# EAGLE board SparkFun RTK Express Plus-Panel (EAGLE 9.6.2), part 1 of 3
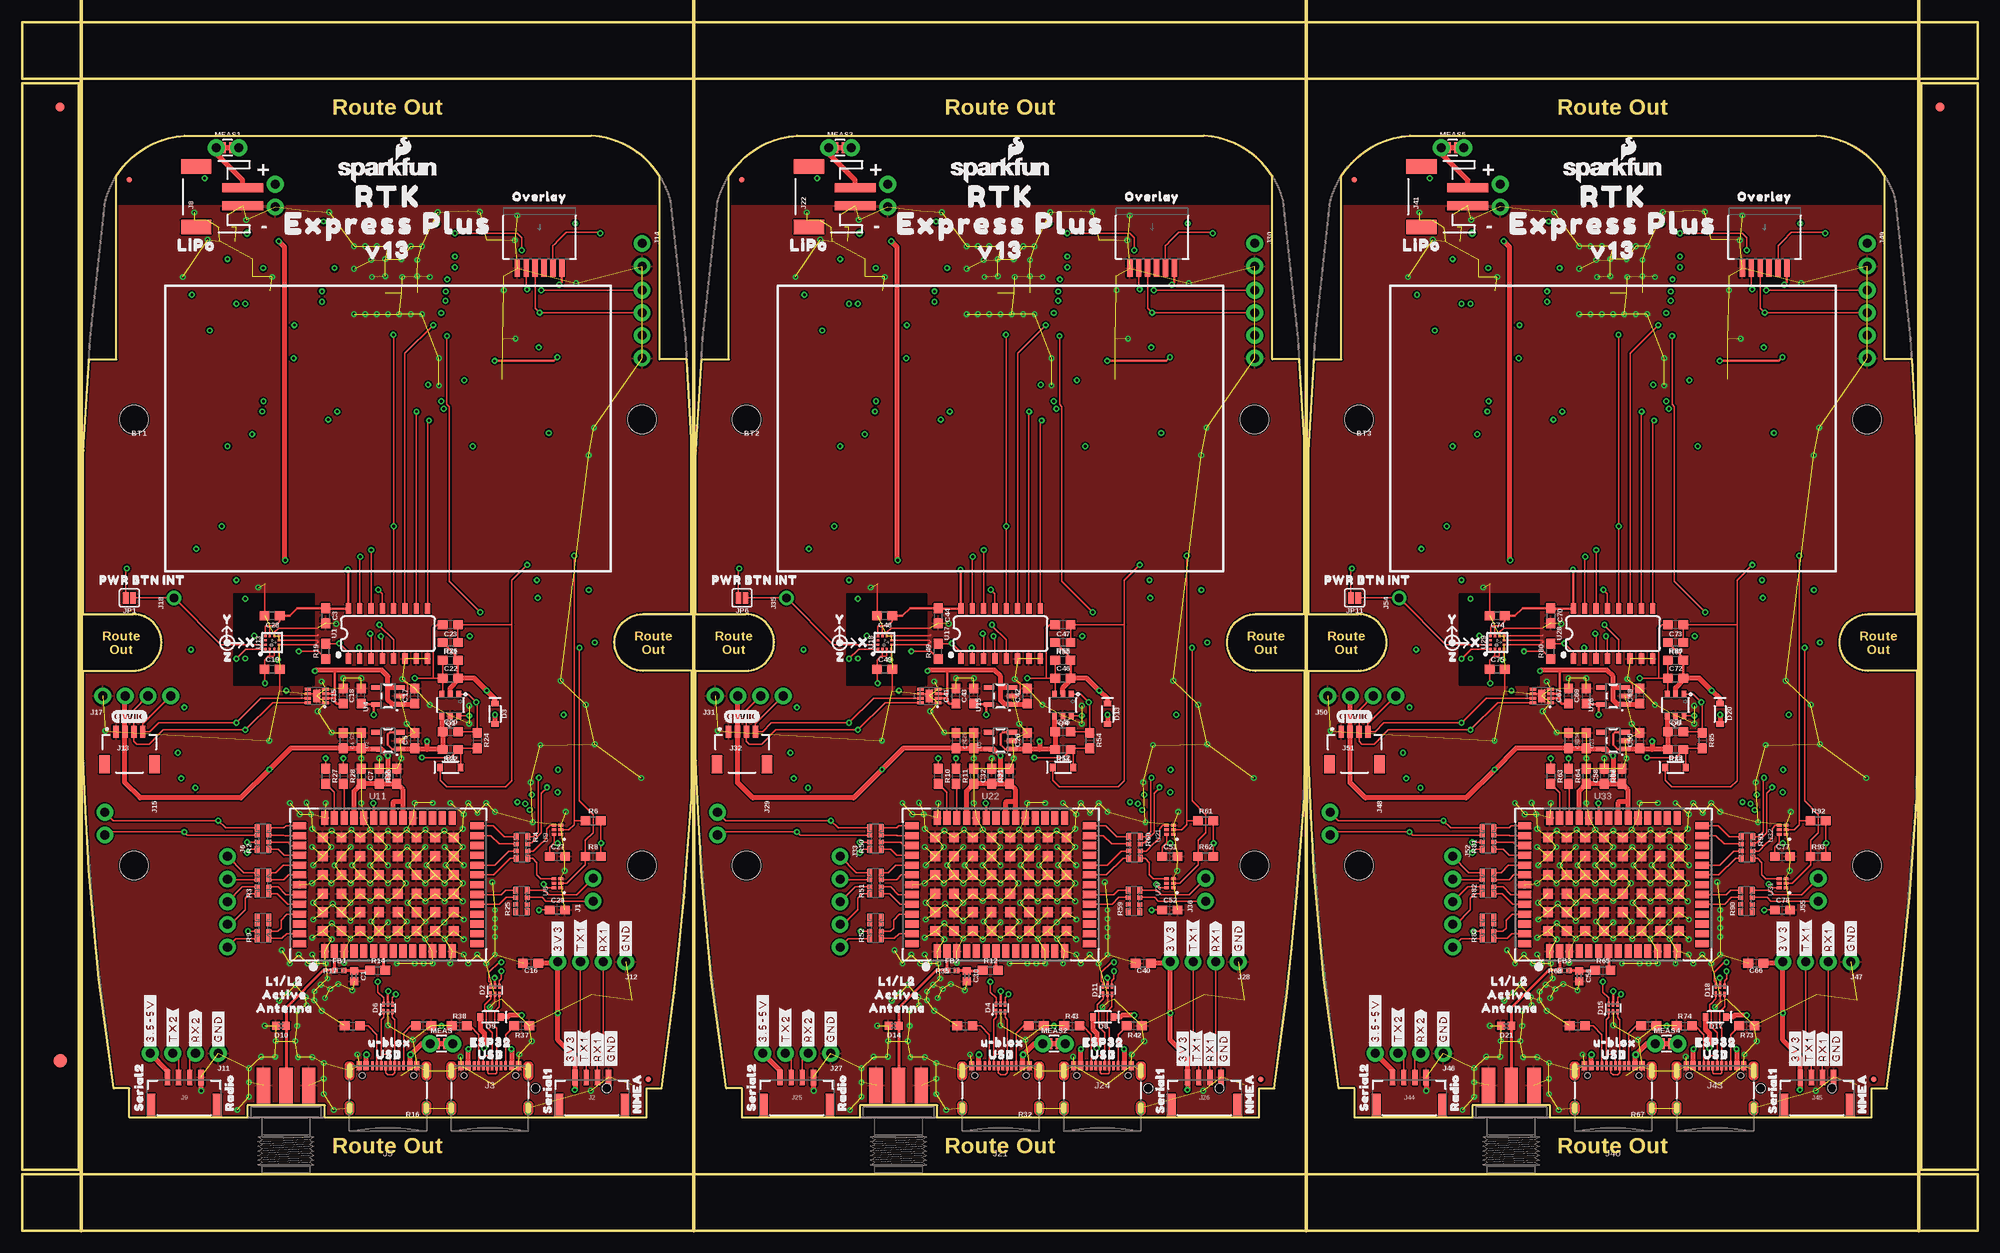
[diagram p0: board, top side]
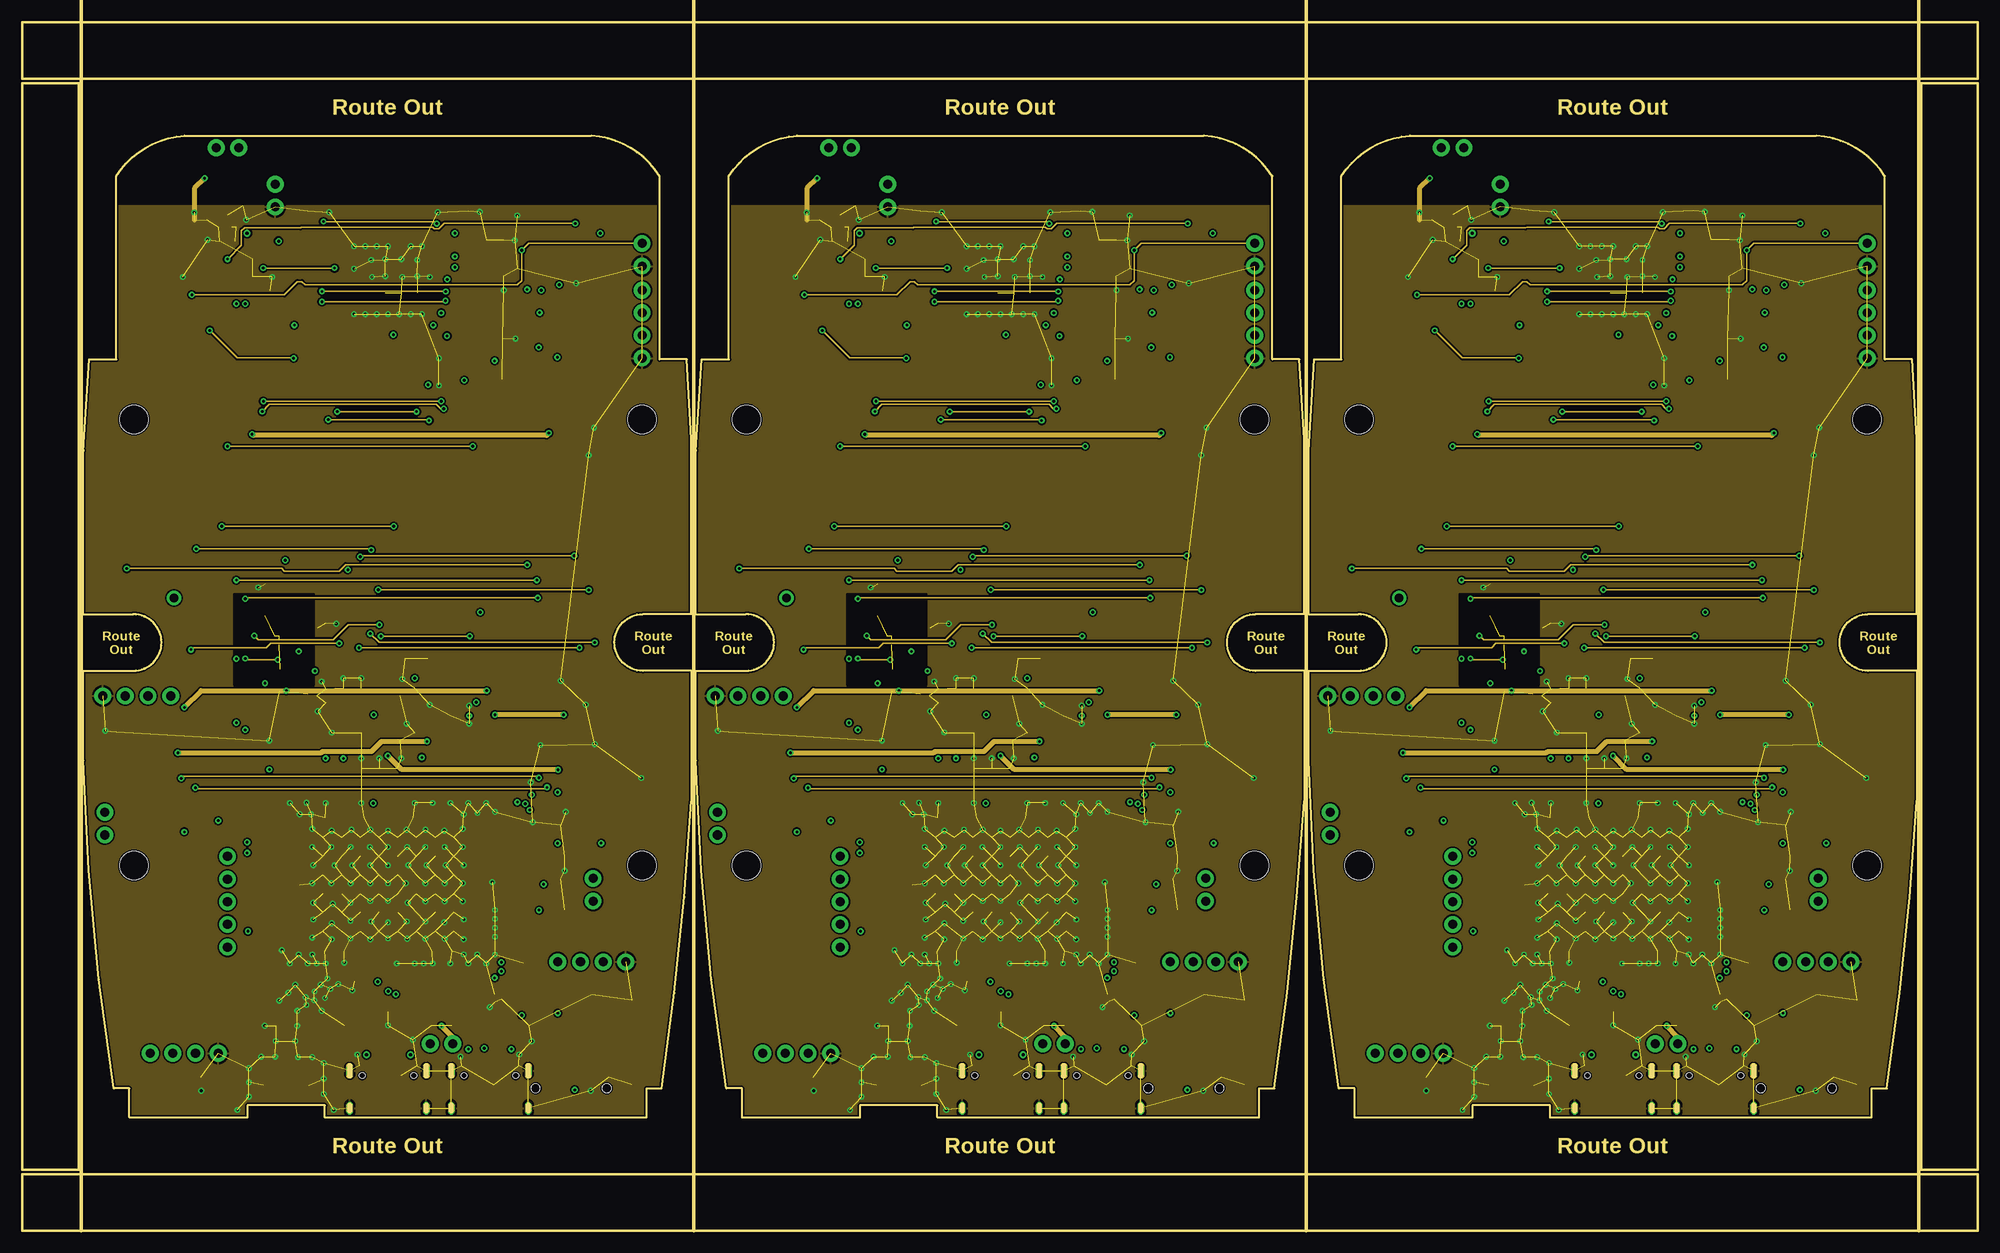
[diagram p1: board, inner layer Route2]
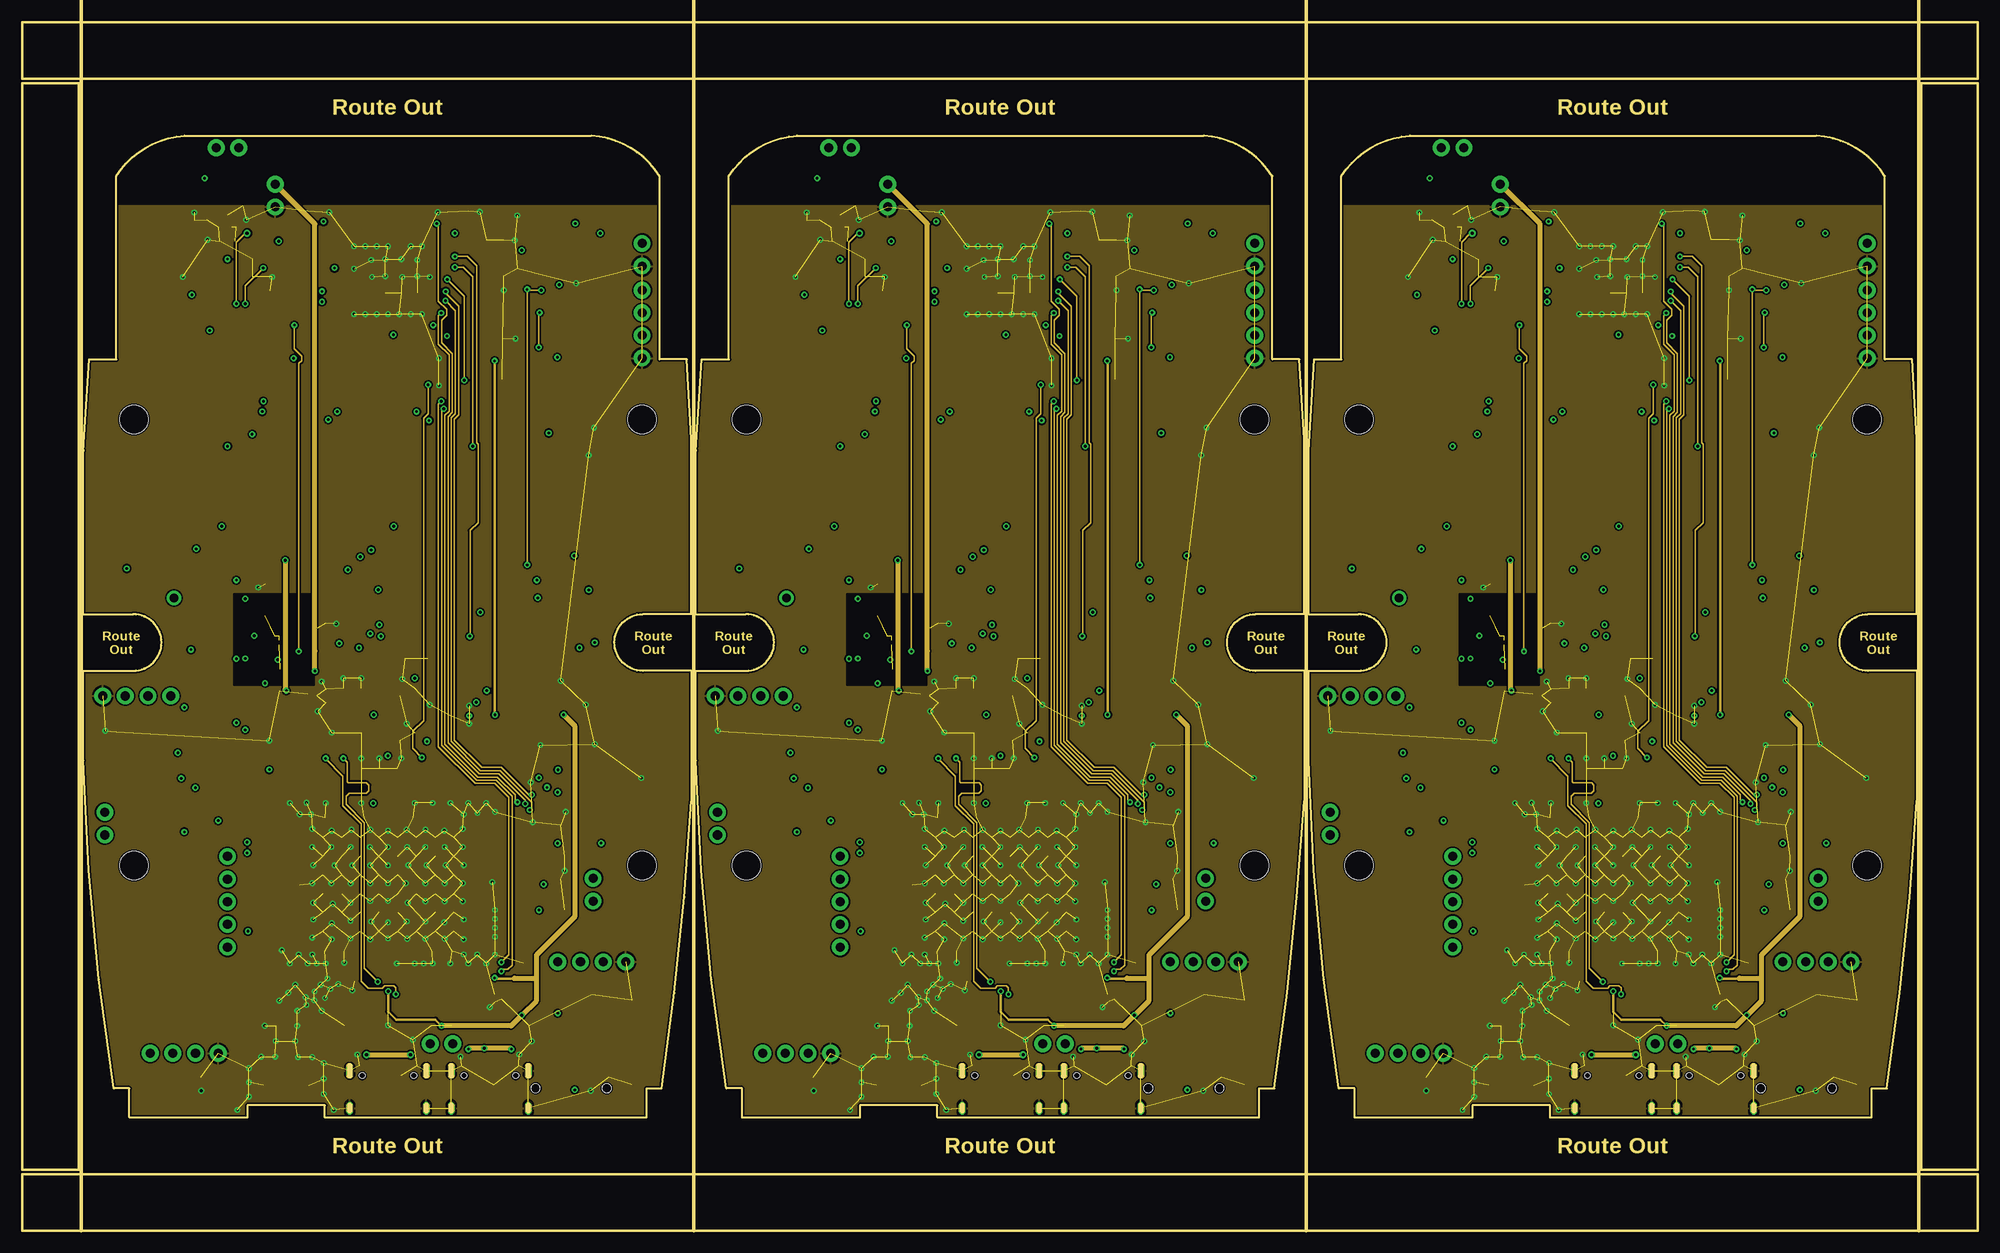
[diagram p2: board, inner layer Route15]
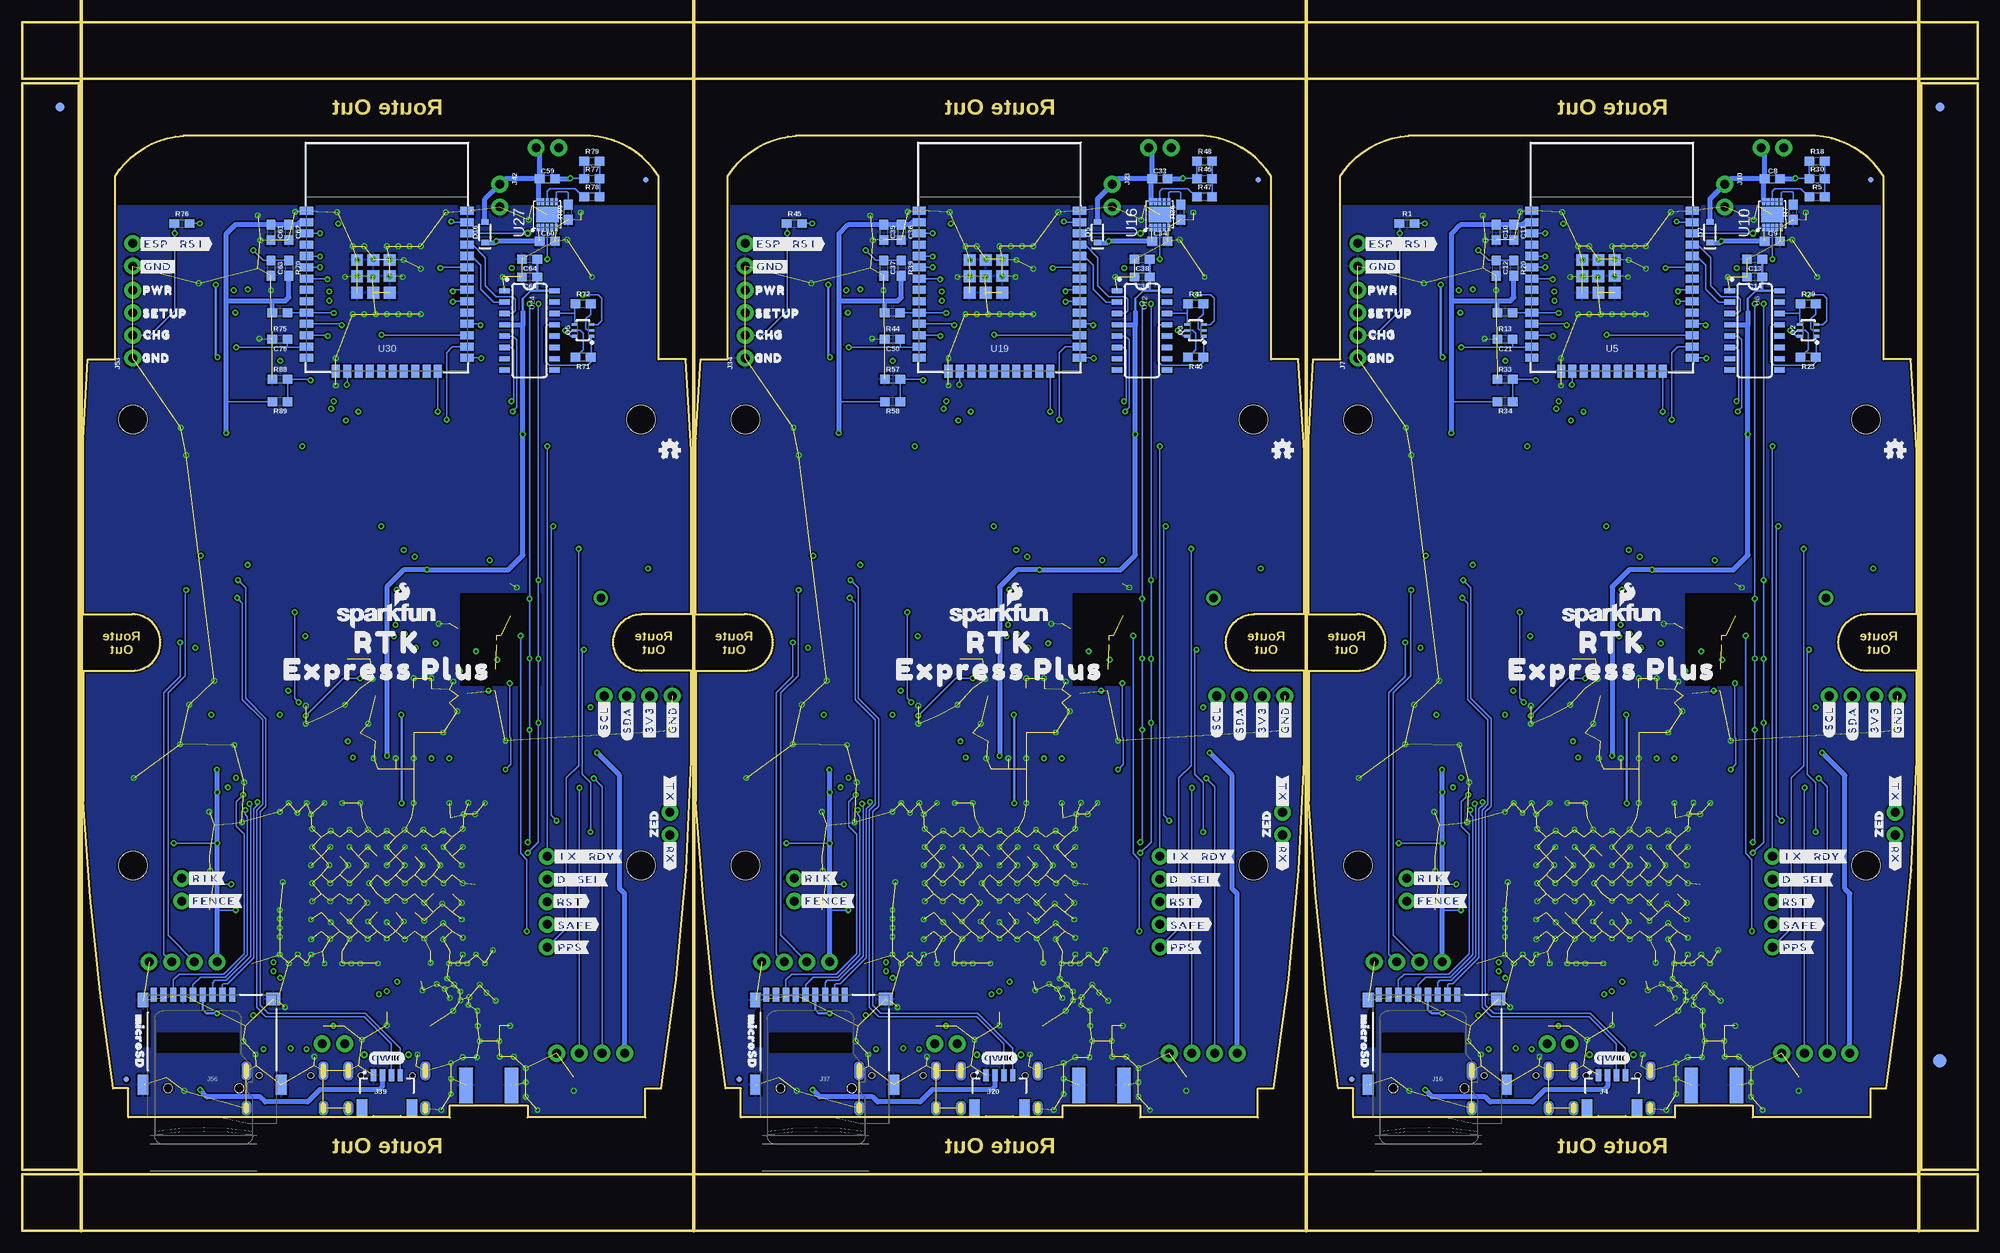
[diagram p3: board, bottom side, seen from below]

Size 219.33 x 135.54 mm. Coordinates in mm from the lower left corner, seen from the top.
Outline: 6.86,87.44 6.86,69.15 12.45,69.15 arc-180 12.45,62.8 6.86,62.8 6.86,52.77 arc8 10.27,15.97 12.02,15.97 12.02,12.7 25.24,12.7 25.24,14.06 33.94,14.06 33.94,12.7 70.02,12.7 70.02,15.97 71.72,15.97 arc5 75.06,48.19 75.06,62.8 69.59,62.8 arc-180 69.59,69.15 75.06,69.15 75.06,88.83 74.55,97.72 71.5,97.72 71.5,118.3 arc52 63.83,122.84 18.21,122.84 arc52 10.54,118.3 10.54,97.72 7.49,97.72 6.86,87.44
Outline: 6.86,87.44 6.86,87.56
Outline: 75.56,87.44 75.56,69.15 81.15,69.15 arc-180 81.15,62.8 75.56,62.8 75.56,52.77 arc8 78.98,15.97 80.73,15.97 80.73,12.7 93.95,12.7 93.95,14.06 102.65,14.06 102.65,12.7 138.73,12.7 138.73,15.97 140.43,15.97 arc5 143.76,48.19 143.76,62.8 138.3,62.8 arc-180 138.3,69.15 143.76,69.15 143.76,88.83 143.25,97.72 140.21,97.72 140.21,118.3 arc52 132.54,122.84 86.92,122.84 arc52 79.25,118.3 79.25,97.72 76.2,97.72 75.56,87.44
Outline: 75.56,87.44 75.56,87.56
Outline: 144.27,87.44 144.27,69.15 149.86,69.15 arc-180 149.86,62.8 144.27,62.8 144.27,52.77 arc8 147.68,15.97 149.43,15.97 149.43,12.7 162.66,12.7 162.66,14.06 171.36,14.06 171.36,12.7 207.43,12.7 207.43,15.97 209.13,15.97 arc5 212.47,48.19 212.47,62.8 207.01,62.8 arc-180 207.01,69.15 212.47,69.15 212.47,88.83 211.96,97.72 208.91,97.72 208.91,118.3 arc52 201.24,122.84 155.62,122.84 arc52 147.95,118.3 147.95,97.72 144.91,97.72 144.27,87.44
Outline: 144.27,87.44 144.27,87.56
Outline: 0,6.35 219.33,6.35 219.33,0 0,0 0,6.35
Outline: 212.98,128.68 219.33,128.68 219.33,6.86 212.98,6.86 212.98,128.68
Outline: 0,135.54 219.33,135.54 219.33,129.19 0,129.19 0,135.54
Outline: 0,128.68 6.35,128.68 6.35,6.86 0,6.86 0,128.68
Copper layers (1+2*15+16): Top 0.035559375mm / dielectric 0.47751875mm / Route2 0.035559375mm / dielectric 0.47751875mm / Route15 0.035559375mm / dielectric 0.47751875mm / Bottom 0.035559375mm
Design rules "SparkFun RTK Express Plus": minimum track width 7mil, minimum drill 12mil, track to track 7mil, track to pad 7mil, pad to pad 7mil, via to via 7mil, smd to smd 7mil, copper to edge 7mil, drill to drill 7mil, minimum pad ring 7mil, minimum via ring 7mil, stop-mask expansion 3mil, vias tented up to drill 25mil, thermal gap 10mil
Net classes: 1 power: width 0.178 mm; 3 RF: width 0.35 mm, clearance 0.203 mm
Milling: 4 lines

## Footprints (pad centres in the part's own frame; a part is rotated, then mirrored left to right if it is on the bottom)
0402 = smd 0.85 x 0.9: 1 -0.58,0; 2 0.58,0
0603 = smd 1.1 x 1: 1 -0.85,0; 2 0.85,0
SOD-323 = smd 0.63 x 0.83: A 1.15,0; C -1.15,0
SOT886 = smd 0.61 x 0.25: 1 -0.405,0.5 | smd 0.56 x 0.25: 2 -0.43,0; 3 -0.43,-0.5; 4 0.43,-0.5; 5 0.43,0; 6 0.43,0.5
SMA-EDGE = smd 1.5 x 4: GND@0 -2.54,0; GND@1 2.54,0; SIG 0,0 | smd 1.5 x 4 bottom: GND@2 -2.54,0; GND@3 2.54,0
FIDUCIAL-1X2 = smd 1 x 1: 1 0,0
FIDUCIAL-1.5X3 = smd 1.5 x 1.5: 1 0,0
0402-TIGHT = smd 0.6 x 0.6: 1 -0.5,0; 2 0.5,0
1X02_NO_SILK = drill 1.016 pad 1.88: 1 0,0; 2 2.54,0
JST-4-SMD-1.25MM-LOCKING = smd 0.6 x 1.7: 1 -1.875,3.3; 2 -0.625,3.3; 3 0.625,3.3; 4 1.875,3.3 | smd 1 x 2.7: NC1 3.725,0.1; NC2 -3.725,0.1
USB-C-16P_4LAYER-PADS = smd 0.3 x 1: A5 -1.25,-0.34; A6 -0.25,-0.34; A7 0.25,-0.34; A8 1.25,-0.34; B5 1.75,-0.34; B6 0.75,-0.34; B7 -0.75,-0.34; B8 -1.75,-0.34 | smd 0.6 x 1: GND -3.225,-0.34; GND2 3.225,-0.34; VBUS1 -2.45,-0.34; VBUS2 2.45,-0.34 | drill 0.4 pad 0.6 long: SHLD1 -4.318,-0.915; SHLD2 4.318,-0.915; SHLD3 -4.318,-5.095; SHLD4 4.318,-5.095 | hole 0.65: -2.89,-1.445; 2.89,-1.445
JST04_1MM_RA = smd 0.6 x 1.35: 1 -1.5,0; 2 -0.5,0; 3 0.5,0; 4 1.5,0 | smd 1.2 x 2: NC1 2.8,-3.675; NC2 -2.8,-3.675
1X05_NO_SILK = drill 1.016 pad 1.88: 1 0,0; 2 2.54,0; 3 5.08,0; 4 7.62,0; 5 10.16,0
1X04_NO_SILK = drill 1.016 pad 1.88: 1 0,0; 2 2.54,0; 3 5.08,0; 4 7.62,0
JST-2-SMD = smd 1 x 4.6: 1 -1,-3.7; 2 1,-3.7 | smd 1.6 x 3.4: NC1 -3.4,1.5; NC2 3.4,1.5
MICROSD-EXTERNALPIN = smd 0.7 x 1.6: 1 2.25,10.5; 2 1.15,10.5; 3 0.05,10.5; 4 -1.05,10.5; 5 -2.15,10.5; 6 -3.25,10.5; 7 -4.35,10.5; 8 -5.45,10.5; 9 -6.55,10.5 | smd 1.2 x 1.6: 10 -7.75,9.9 | smd 1.2 x 2.2: 11 -7.75,0.4; 12 7.75,0.4 | smd 1.6 x 1.4: 13 6.85,10 | hole 1: 3.05,0; -4.95,0
1X01_NO_SILK = drill 0.95 pad 1.6: 1 0,0
FPC_6_1MM-LIF = smd 0.6 x 2: 1 -2.5,3; 2 -1.5,3; 3 -0.5,3; 4 0.5,3; 5 1.5,3; 6 2.5,3
SMT-JUMPER_2_NO_SILK = smd 0.635 x 1.27: 1 -0.406,0; 2 0.406,0
FIDUCIAL-MICRO = smd 0.635 x 0.635: 1 0,0
COMBO-JUMPER_2_NC_TRACE = smd 0.635 x 1.27: 1 -0.508,0; 2 0.508,0 | drill 1.016 pad 1.88: 3 -1.27,0; 4 1.27,0
SOT26 = smd 0.55 x 0.8: D1 -0.95,1.2; D2 0.95,1.2; G1 -0.95,-1.2; G2 0.95,-1.2; S1 0,1.2; S2 0,-1.2
SC70-6 = smd 0.3 x 0.66: 1 -0.65,-0.92; 2 0,-0.92; 3 0.65,-0.92; 4 0.65,0.92; 5 0,0.92; 6 -0.65,0.92
1206_RA = smd 0.8 x 0.55: P1 -1.2,-0.62; P4 1.2,-0.62; P5 1.2,0.68; P8 -1.2,0.68 | smd 0.5 x 0.55: P2 -0.4,-0.62; P3 0.4,-0.62; P6 0.4,0.68; P7 -0.4,0.68
SO16 = smd 0.6 x 1.2: 1 -4.445,-2.8; 2 -3.175,-2.8; 3 -1.905,-2.8; 4 -0.635,-2.8; 5 0.635,-2.8; 6 1.905,-2.8; 7 3.175,-2.8; 8 4.445,-2.8; 9 4.445,2.8; 10 3.175,2.8; 11 1.905,2.8; 12 0.635,2.8; 13 -0.635,2.8; 14 -1.905,2.8; 15 -3.175,2.8; 16 -4.445,2.8
SOT23-5 = smd 0.55 x 1.2: 1 -0.95,-1.3; 2 0,-1.3; 3 0.95,-1.3; 4 0.95,1.3; 5 -0.95,1.3
ESP-WROOM-32D = smd 0.9 x 1.5: 1 6.43,9; 2 5.16,9; 3 3.89,9; 4 2.62,9; 5 1.35,9; 6 0.08,9; 7 -1.19,9; 8 -2.46,9; 9 -3.73,9; 10 -5,9; 11 -6.27,9; 12 -7.54,9; 13 -8.81,9; 14 -10.08,9; 25 -10.08,-9; 26 -8.81,-9; 27 -7.54,-9; 28 -6.27,-9; 29 -5,-9; 30 -3.73,-9; 31 -2.46,-9; 32 -1.19,-9; 33 0.08,-9; 34 1.35,-9; 35 2.62,-9; 36 3.89,-9; 37 5.16,-9; 38 6.43,-9 | smd 1.5 x 0.9: 15 -11.57,5.715; 16 -11.57,4.445; 17 -11.57,3.175; 18 -11.57,1.905; 19 -11.57,0.635; 20 -11.57,-0.635; 21 -11.57,-1.905; 22 -11.57,-3.175; 23 -11.57,-4.445; 24 -11.57,-5.715 | smd 1.33 x 1.33: GND -0.912,1.531; GNDT1 -2.751,3.346; GNDT2 -2.761,1.516; GNDT3 -2.751,-0.314; GNDT4 -0.891,-0.324; GNDT5 0.909,-0.314; GNDT6 0.909,1.516; GNDT7 0.909,3.346; GNDT8 -0.921,3.346
SO016 = smd 0.6 x 1.2: 1 -4.445,-2.8; 2 -3.175,-2.8; 3 -1.905,-2.8; 4 -0.635,-2.8; 5 0.635,-2.8; 6 1.905,-2.8; 7 3.175,-2.8; 8 4.445,-2.8; 9 4.445,2.8; 10 3.175,2.8; 11 1.905,2.8; 12 0.635,2.8; 13 -0.635,2.8; 14 -1.905,2.8; 15 -3.175,2.8; 16 -4.445,2.8
DFN-8 = smd 0.3 x 0.7: 1 -0.75,-0.99; 2 -0.25,-0.99; 3 0.25,-0.99; 4 0.75,-0.99; 5 0.75,0.99; 6 0.25,0.99; 7 -0.25,0.99; 8 -0.75,0.99 | smd 1.38 x 0.8: 9 0,0
SIP6 = smd 0.3 x 0.52: P1 -0.508,-0.381; P2 -0.008,-0.381; P3 0.492,-0.381; P4 0.492,0.369; P5 -0.008,0.369; P6 -0.508,0.369
DFN-10 = smd 0.8 x 0.35: 1 -1.45,1; 2 -1.45,0.5; 3 -1.45,0; 4 -1.45,-0.5; 5 -1.45,-1; 6 1.45,-1; 7 1.45,-0.5; 8 1.45,0; 9 1.45,0.5; 10 1.45,1 | smd 1.7 x 2.5: 11 0,0
UBLOX_ZED_F9R = smd 1.1 x 1.1: G1 -7.312,-5.37; G2 -5.212,-5.37; G3 -3.112,-5.37; G4 -1.012,-5.37; G5 1.088,-5.37; G6 3.188,-5.37; G7 5.288,-5.37; G8 7.388,-5.37; G9 7.388,-3.27; G10 5.288,-3.27; G11 3.188,-3.27; G12 1.088,-3.27; G13 -1.012,-3.27; G14 -3.112,-3.27; G15 -5.212,-3.27; G16 -7.312,-3.27; G17 -7.312,-1.17; G18 -5.212,-1.17; G19 -3.112,-1.17; G20 -1.012,-1.17; G21 1.088,-1.17; G22 3.188,-1.17; G23 5.288,-1.17; G24 7.388,-1.17; G25 7.388,0.93; G26 5.288,0.93; G27 3.188,0.93; G28 1.088,0.93; G29 -1.012,0.93; G30 -3.112,0.93; G31 -5.212,0.93; G32 -7.312,0.93; G33 -7.312,3.03; G34 -5.212,3.03; G35 -3.112,3.03; G36 -1.012,3.03; G37 1.088,3.03; G38 3.188,3.03; G39 5.288,3.03; G40 7.388,3.03; G41 7.388,5.13; G42 5.288,5.13; G43 3.188,5.13; G44 1.088,5.13; G45 -1.012,5.13; G46 -3.112,5.13; G47 -5.212,5.13; G48 -7.312,5.13 | smd 0.8 x 1.5: P1 -7.112,-7.62; P2 -6.012,-7.62; P3 -4.912,-7.62; P4 -3.812,-7.62; P5 -2.712,-7.62; P6 -1.612,-7.62; P7 -0.512,-7.62; P8 0.588,-7.62; P9 1.688,-7.62; P10 2.788,-7.62; P11 3.888,-7.62; P12 4.988,-7.62; P13 6.088,-7.62; P14 7.188,-7.62; P28 7.188,7.33; P29 6.088,7.33; P30 4.988,7.33; P31 3.888,7.33; P32 2.788,7.33; P33 1.688,7.33; P34 0.588,7.33; P35 -0.512,7.33; P36 -1.612,7.33; P37 -2.712,7.33; P38 -3.812,7.33; P39 -4.912,7.33; P40 -6.012,7.33; P41 -7.112,7.33 | smd 1.5 x 0.8: P15 9.988,-6.77; P16 9.988,-5.67; P17 9.988,-4.57; P18 9.988,-3.47; P19 9.988,-2.37; P20 9.988,-1.27; P21 9.988,-0.17; P22 9.988,0.93; P23 9.988,2.03; P24 9.988,3.13; P25 9.988,4.23; P26 9.988,5.33; P27 9.988,6.43; P42 -9.912,6.43; P43 -9.912,5.33; P44 -9.912,4.23; P45 -9.912,3.13; P46 -9.912,2.03; P47 -9.912,0.93; P48 -9.912,-0.17; P49 -9.912,-1.27; P50 -9.912,-2.37; P51 -9.912,-3.47; P52 -9.912,-4.57; P53 -9.912,-5.67; P54 -9.912,-6.77
LGA-12-LISDH12 = smd 0.275 x 0.25: 1 -0.75,0.75; 2 -0.75,0.25; 3 -0.75,-0.25; 4 -0.75,-0.75; 7 0.75,-0.75; 8 0.75,-0.25; 9 0.75,0.25; 10 0.75,0.75 | smd 0.25 x 0.275: 5 -0.25,-0.75; 6 0.25,-0.75; 11 0.25,0.75; 12 -0.25,0.75
1553DBK-ENCLOSURE = hole 3.2: -25.006,28.499; 25.006,28.499; 25.006,-28.499; -25.006,-28.499

## Placement (x,y rotation side)
BT1  LIPO-OUTLINE1000  [LIPO-1000]  41.02,89.97 90 top
BT2  LIPO-OUTLINE1000  [LIPO-1000]  109.73,89.97 90 top
BT3  LIPO-OUTLINE1000  [LIPO-1000]  178.43,89.97 90 top
C1  47pF  [0402]  37.21,28.56 270 top
C2  1.0uF  [0603]  42.02,50.97 90 top
C3  0.1uF  [0603]  34.02,68.97 270 top
C4  1.0uF  [0603]  38.02,54.97 90 top
C5  0.1uF  [0603]  36.02,54.97 270 top
C6  1.0uF  [0603]  44.02,54.97 90 top
C7  0.1uF  [0603]  38.02,50.97 270 top
C8  4.7uF  [0603]  23.02,117.97 0 bottom
C9  4.7uF  [0603]  23.02,110.97 0 bottom
C10  10uF  [0603]  54.02,111.97 270 bottom
C11  0.1uF  [0603]  52.02,111.97 270 bottom
C12  0.1uF  [0603]  54.02,107.97 270 bottom
C13  0.1uF  [0603]  25.02,108.97 180 bottom
C14  10uF  [0603]  25.02,106.97 180 bottom
C15  0.1uF  [0603]  36.02,59.97 90 top
C16  0.1uF  [0603]  57.02,29.97 180 top
C17  1.0uF  [0603]  44.02,59.97 90 top
C18  1.0uF  [0603]  38.02,59.97 90 top
C19  10uF  [0603]  28.02,62.97 0 top
C20  10uF  [0603]  48.02,55.97 0 top
C21  0.1uF  [0603]  53.02,99.97 180 bottom
C22  0.1uF  [0603]  48.02,61.97 0 top
C23  0.1uF  [0603]  48.02,67.97 180 top
C24  1.0uF  [0603]  106.73,54.97 90 top
C25  0.1uF  [0603]  104.73,54.97 270 top
C26  1.0uF  [0603]  112.73,54.97 90 top
C27  0.1uF  [0603]  60.02,41.97 0 top
C28  0.1uF  [0603]  28.02,68.97 180 top
C29  0.1uF  [0603]  60.02,35.97 0 top
C30  47pF  [0402]  105.92,28.56 270 top
C31  1.0uF  [0603]  110.73,50.97 90 top
C32  0.1uF  [0603]  106.73,50.97 270 top
C33  4.7uF  [0603]  91.73,117.97 0 bottom
C34  4.7uF  [0603]  91.73,110.97 0 bottom
C35  10uF  [0603]  122.73,111.97 270 bottom
C36  0.1uF  [0603]  120.73,111.97 270 bottom
C37  0.1uF  [0603]  122.73,107.97 270 bottom
C38  0.1uF  [0603]  93.73,108.97 180 bottom
C39  10uF  [0603]  93.73,106.97 180 bottom
C40  0.1uF  [0603]  125.73,29.97 180 top
C41  0.1uF  [0603]  104.73,59.97 90 top
C42  1.0uF  [0603]  112.73,59.97 90 top
C43  1.0uF  [0603]  106.73,59.97 90 top
C44  0.1uF  [0603]  102.73,68.97 270 top
C45  10uF  [0603]  116.73,55.97 0 top
C46  0.1uF  [0603]  116.73,61.97 0 top
C47  0.1uF  [0603]  116.73,67.97 180 top
C48  0.1uF  [0603]  96.73,68.97 180 top
C49  10uF  [0603]  96.73,62.97 0 top
C50  0.1uF  [0603]  121.73,99.97 180 bottom
C51  0.1uF  [0603]  128.73,41.97 0 top
C52  0.1uF  [0603]  128.73,35.97 0 top
C53  1.0uF  [0603]  175.43,54.97 90 top
C54  0.1uF  [0603]  173.43,54.97 270 top
C55  1.0uF  [0603]  181.43,54.97 90 top
C56  47pF  [0402]  174.62,28.56 270 top
C57  1.0uF  [0603]  179.43,50.97 90 top
C58  0.1uF  [0603]  175.43,50.97 270 top
C59  4.7uF  [0603]  160.43,117.97 0 bottom
C60  4.7uF  [0603]  160.43,110.97 0 bottom
C61  10uF  [0603]  191.43,111.97 270 bottom
C62  0.1uF  [0603]  189.43,111.97 270 bottom
C63  0.1uF  [0603]  191.43,107.97 270 bottom
C64  0.1uF  [0603]  162.43,108.97 180 bottom
C65  10uF  [0603]  162.43,106.97 180 bottom
C66  0.1uF  [0603]  194.43,29.97 180 top
C67  0.1uF  [0603]  173.43,59.97 90 top
C68  1.0uF  [0603]  181.43,59.97 90 top
C69  1.0uF  [0603]  175.43,59.97 90 top
C70  0.1uF  [0603]  171.43,68.97 270 top
C71  10uF  [0603]  185.43,55.97 0 top
C72  0.1uF  [0603]  185.43,61.97 0 top
C73  0.1uF  [0603]  185.43,67.97 180 top
C74  0.1uF  [0603]  165.43,68.97 180 top
C75  10uF  [0603]  165.43,62.97 0 top
C76  0.1uF  [0603]  190.43,99.97 180 bottom
C77  0.1uF  [0603]  197.43,41.97 0 top
C78  0.1uF  [0603]  197.43,35.97 0 top
D1  250mA/100V  [SOD-323]  48.02,51.97 0 top
D2  PRTR5V0U2F  [SOT886]  53.02,26.97 90 top
D3  3A/10V/280mV  [SOD-323]  53.02,57.97 270 top
D4  PRTR5V0U2F  [SOT886]  109.73,24.97 90 top
D5  3A/10V/280mV  [SOD-323]  98.73,111.97 90 bottom
D6  PRTR5V0U2F  [SOT886]  41.02,24.97 90 top
D7  3A/10V/280mV  [SOD-323]  30.02,111.97 90 bottom
D8  3A/10V/280mV  [SOD-323]  121.23,23.97 180 top
D9  3A/10V/280mV  [SOD-323]  52.52,23.97 180 top
D10  PESD0402-0402  [0402]  29.02,22.97 180 top
D11  PRTR5V0U2F  [SOT886]  121.73,26.97 90 top
D12  250mA/100V  [SOD-323]  116.73,51.97 0 top
D13  3A/10V/280mV  [SOD-323]  121.73,57.97 270 top
D14  PESD0402-0402  [0402]  97.73,22.97 180 top
D15  PRTR5V0U2F  [SOT886]  178.43,24.97 90 top
D16  3A/10V/280mV  [SOD-323]  167.43,111.97 90 bottom
D17  3A/10V/280mV  [SOD-323]  189.93,23.97 180 top
D18  PRTR5V0U2F  [SOT886]  190.43,26.97 90 top
D19  250mA/100V  [SOD-323]  185.43,51.97 0 top
D20  3A/10V/280mV  [SOD-323]  190.43,57.97 270 top
D21  PESD0402-0402  [0402]  166.43,22.97 180 top
E1  SMA  [SMA-EDGE]  29.59,16.3 180 top
E2  SMA  [SMA-EDGE]  98.3,16.3 180 top
E3  SMA  [SMA-EDGE]  167,16.3 180 top
E$1  [FIDUCIAL-1X2]  4.23,126.01 0 top
E$2  [FIDUCIAL-1X2]  4.23,126.01 0 bottom
E$3  [FIDUCIAL-1X2]  215.09,126.01 0 top
E$4  [FIDUCIAL-1X2]  215.09,126.01 0 bottom
E$5  [FIDUCIAL-1.5X3]  4.23,19.05 0 top
E$6  [FIDUCIAL-1.5X3]  4.23,19.05 0 bottom
FB1  2.66Ω  [0402-TIGHT]  35.56,29.2 0 top
FB2  2.66Ω  [0402-TIGHT]  104.27,29.2 0 top
FB3  2.66Ω  [0402-TIGHT]  172.97,29.2 0 top
J1  [1X02_NO_SILK]  64.02,36.97 90 top
J2  [JST-4-SMD-1.25MM-LOCKING]  63.88,13.89 0 top
J3  USB Female Type C Connector  [USB-C-16P_4LAYER-PADS]  52.45,18.84 0 top
J4  External  [JST04_1MM_RA]  41.02,17.44 0 bottom
J5  USB Female Type C Connector  [USB-C-16P_4LAYER-PADS]  41.02,18.84 0 top
J6  [1X05_NO_SILK]  23.02,41.97 270 top
J7  [1X04_NO_SILK]  69.52,97.87 90 bottom
J8  [JST-2-SMD]  21.02,115.97 90 top
J9  [JST-4-SMD-1.25MM-LOCKING]  18.16,13.89 0 top
J10  [1X02_NO_SILK]  28.37,117.37 270 bottom
J11  [1X04_NO_SILK]  21.97,19.89 180 top
J12  [1X04_NO_SILK]  67.69,30.14 180 top
J13  Internal  [JST04_1MM_RA]  12.02,55.97 0 top
J14  [1X02_NO_SILK]  69.52,110.73 270 top
J15  [1X02_NO_SILK]  9.27,46.92 270 top
J16  MICRO-SD-PUSH-PUSH-EXT-PIN  [MICROSD-EXTERNALPIN]  60.62,15.97 0 bottom
J17  Qwiic Right Angle  [1X04_NO_SILK]  9.02,59.97 0 top
J18  [1X01_NO_SILK]  17.02,70.97 90 top
J19  [FPC_6_1MM-LIF]  58.02,110.97 180 top
J20  External  [JST04_1MM_RA]  109.73,17.44 0 bottom
J21  USB Female Type C Connector  [USB-C-16P_4LAYER-PADS]  109.73,18.84 0 top
J22  [JST-2-SMD]  89.73,115.97 90 top
J23  [1X02_NO_SILK]  97.08,117.37 270 bottom
J24  USB Female Type C Connector  [USB-C-16P_4LAYER-PADS]  121.16,18.84 0 top
J25  [JST-4-SMD-1.25MM-LOCKING]  86.87,13.89 0 top
J26  [JST-4-SMD-1.25MM-LOCKING]  132.59,13.89 0 top
J27  [1X04_NO_SILK]  90.68,19.89 180 top
J28  [1X04_NO_SILK]  136.4,30.14 180 top
J29  [1X02_NO_SILK]  77.98,46.92 270 top
J30  [1X02_NO_SILK]  138.23,110.73 270 top
J31  Qwiic Right Angle  [1X04_NO_SILK]  77.73,59.97 0 top
J32  Internal  [JST04_1MM_RA]  80.73,55.97 0 top
J33  [1X05_NO_SILK]  91.73,41.97 270 top
J34  [1X04_NO_SILK]  138.23,97.87 90 bottom
J35  [1X01_NO_SILK]  85.73,70.97 90 top
J36  [1X02_NO_SILK]  132.73,36.97 90 top
J37  MICRO-SD-PUSH-PUSH-EXT-PIN  [MICROSD-EXTERNALPIN]  129.33,15.97 0 bottom
J38  [FPC_6_1MM-LIF]  126.73,110.97 180 top
J39  External  [JST04_1MM_RA]  178.43,17.44 0 bottom
J40  USB Female Type C Connector  [USB-C-16P_4LAYER-PADS]  178.43,18.84 0 top
J41  [JST-2-SMD]  158.43,115.97 90 top
J42  [1X02_NO_SILK]  165.79,117.37 270 bottom
J43  USB Female Type C Connector  [USB-C-16P_4LAYER-PADS]  189.86,18.84 0 top
J44  [JST-4-SMD-1.25MM-LOCKING]  155.57,13.89 0 top
J45  [JST-4-SMD-1.25MM-LOCKING]  201.29,13.89 0 top
J46  [1X04_NO_SILK]  159.38,19.89 180 top
J47  [1X04_NO_SILK]  205.1,30.14 180 top
J48  [1X02_NO_SILK]  146.68,46.92 270 top
J49  [1X02_NO_SILK]  206.93,110.73 270 top
J50  Qwiic Right Angle  [1X04_NO_SILK]  146.43,59.97 0 top
J51  Internal  [JST04_1MM_RA]  149.43,55.97 0 top
J52  [1X05_NO_SILK]  160.43,41.97 270 top
J53  [1X04_NO_SILK]  206.93,97.87 90 bottom
J54  [1X01_NO_SILK]  154.43,70.97 90 top
J55  [1X02_NO_SILK]  201.43,36.97 90 top
J56  MICRO-SD-PUSH-PUSH-EXT-PIN  [MICROSD-EXTERNALPIN]  198.03,15.97 0 bottom
J57  [FPC_6_1MM-LIF]  195.43,110.97 180 top
JP1  JUMPER-SMT_2_NO_SILK  [SMT-JUMPER_2_NO_SILK]  12.02,70.97 180 top
JP2  FIDUCIALUFIDUCIAL  [FIDUCIAL-MICRO]  138.94,16.98 0 top
JP3  FIDUCIALUFIDUCIAL  [FIDUCIAL-MICRO]  80.7,117.86 0 top
JP4  FIDUCIALUFIDUCIAL  [FIDUCIAL-MICRO]  138.94,16.98 0 bottom
JP5  FIDUCIALUFIDUCIAL  [FIDUCIAL-MICRO]  80.7,117.86 0 bottom
JP6  JUMPER-SMT_2_NO_SILK  [SMT-JUMPER_2_NO_SILK]  80.73,70.97 180 top
JP7  FIDUCIALUFIDUCIAL  [FIDUCIAL-MICRO]  207.64,16.98 0 top
JP8  FIDUCIALUFIDUCIAL  [FIDUCIAL-MICRO]  149.4,117.86 0 top
JP9  FIDUCIALUFIDUCIAL  [FIDUCIAL-MICRO]  207.64,16.98 0 bottom
JP10  FIDUCIALUFIDUCIAL  [FIDUCIAL-MICRO]  149.4,117.86 0 bottom
JP11  JUMPER-SMT_2_NO_SILK  [SMT-JUMPER_2_NO_SILK]  149.43,70.97 180 top
JP21  FIDUCIALUFIDUCIAL  [FIDUCIAL-MICRO]  70.23,16.98 0 top
JP61  FIDUCIALUFIDUCIAL  [FIDUCIAL-MICRO]  11.99,117.86 0 top
JP71  FIDUCIALUFIDUCIAL  [FIDUCIAL-MICRO]  70.23,16.98 0 bottom
JP81  FIDUCIALUFIDUCIAL  [FIDUCIAL-MICRO]  11.99,117.86 0 bottom
LOGO1  OSHW-LOGOMINI  [OSHW-LOGO-MINI]  9.27,87.56 0 bottom
LOGO2  SFE_LOGO_NAME_FLAME.1_INCH  [SFE_LOGO_NAME_FLAME_.1]  41.02,68.97 0 bottom
LOGO3  SFE_LOGO_NAME_FLAME.1_INCH  [SFE_LOGO_NAME_FLAME_.1]  41.02,118.97 0 top
LOGO4  OSHW-LOGOMINI  [OSHW-LOGO-MINI]  77.98,87.56 0 bottom
LOGO5  SFE_LOGO_NAME_FLAME.1_INCH  [SFE_LOGO_NAME_FLAME_.1]  109.73,68.97 0 bottom
LOGO6  SFE_LOGO_NAME_FLAME.1_INCH  [SFE_LOGO_NAME_FLAME_.1]  109.73,118.97 0 top
LOGO7  OSHW-LOGOMINI  [OSHW-LOGO-MINI]  146.68,87.56 0 bottom
LOGO8  SFE_LOGO_NAME_FLAME.1_INCH  [SFE_LOGO_NAME_FLAME_.1]  178.43,68.97 0 bottom
LOGO9  SFE_LOGO_NAME_FLAME.1_INCH  [SFE_LOGO_NAME_FLAME_.1]  178.43,118.97 0 top
MEAS  JUMPER-COMBO_2_NC_TRACE  [COMBO-JUMPER_2_NC_TRACE]  47.02,20.97 0 top
MEAS1  JUMPER-COMBO_2_NC_TRACE  [COMBO-JUMPER_2_NC_TRACE]  23.02,121.47 0 top
MEAS2  JUMPER-COMBO_2_NC_TRACE  [COMBO-JUMPER_2_NC_TRACE]  115.73,20.97 0 top
MEAS3  JUMPER-COMBO_2_NC_TRACE  [COMBO-JUMPER_2_NC_TRACE]  91.73,121.47 0 top
MEAS4  JUMPER-COMBO_2_NC_TRACE  [COMBO-JUMPER_2_NC_TRACE]  184.43,20.97 0 top
MEAS5  JUMPER-COMBO_2_NC_TRACE  [COMBO-JUMPER_2_NC_TRACE]  160.43,121.47 0 top
Q1  SIL2308-TP  [SOT26]  48.02,58.97 180 top
Q2  MBT3904DW1T1  [SC70-6]  19.02,100.97 90 bottom
Q3  MBT3904DW1T1  [SC70-6]  87.73,100.97 90 bottom
Q4  SIL2308-TP  [SOT26]  116.73,58.97 180 top
Q5  MBT3904DW1T1  [SC70-6]  156.43,100.97 90 bottom
Q6  SIL2308-TP  [SOT26]  185.43,58.97 180 top
R1  470  [0603]  64.02,112.97 0 bottom
R2  33  [1206_RA]  27.02,43.97 90 top
R3  33  [1206_RA]  27.02,38.97 90 top
R4  33  [1206_RA]  56.02,42.97 270 top
R5  0  [0603]  18.02,115.97 0 bottom
R6  10k  [0603]  64.02,45.97 0 top
R7  1k  [0603]  20.7,114.23 90 bottom
R8  10k  [0603]  64.02,41.97 0 top
R9  33  [1206_RA]  27.02,33.97 90 top
R10  27  [0603]  102.73,50.97 270 top
R11  27  [0603]  104.73,50.97 270 top
R12  10  [0603]  108.58,29.2 0 top
R13  100k  [0603]  53.02,102.97 180 bottom
R14  10  [0603]  39.88,29.2 0 top
R15  100k  [0603]  40.02,50.97 270 top
R16  5.1k  [0603]  45.02,22.97 180 top
R17  5.1k  [0603]  37.02,22.97 0 top
R18  10k  [0603]  18.02,119.97 0 bottom
R19  1k  [0603]  34.02,64.97 90 top
R20  100k  [0603]  52.02,107.97 270 bottom
R21  100k  [0603]  108.73,50.97 270 top
R22  100k  [0603]  48.02,53.97 180 top
R23  10k  [0603]  19.02,97.97 180 bottom
R24  300k  [0603]  51.02,54.97 270 top
R25  33  [1206_RA]  56.02,36.97 90 top
R26  100k  [0603]  48.02,63.97 0 top
R27  27  [0603]  34.02,50.97 270 top
R28  27  [0603]  36.02,50.97 270 top
R29  10k  [0603]  19.02,103.97 0 bottom
R30  150k  [0603]  18.02,117.97 0 bottom
R31  10k  [0603]  48.02,65.97 180 top
R32  5.1k  [0603]  113.73,22.97 180 top
R33  10k  [0603]  53.01,95.52 0 bottom
R34  3.3k  [0603]  53.01,92.98 180 bottom
R35  5.1k  [0603]  105.73,22.97 0 top
R36  1k  [0603]  89.41,114.23 90 bottom
R37  5.1k  [0603]  56.02,22.97 180 top
R38  5.1k  [0603]  49.02,22.97 0 top
R39  100k  [0603]  120.73,107.97 270 bottom
R40  10k  [0603]  87.73,97.97 180 bottom
R41  10k  [0603]  87.73,103.97 0 bottom
R42  5.1k  [0603]  124.73,22.97 180 top
R43  5.1k  [0603]  117.73,22.97 0 top
R44  100k  [0603]  121.73,102.97 180 bottom
R45  470  [0603]  132.73,112.97 0 bottom
R46  150k  [0603]  86.73,117.97 0 bottom
R47  0  [0603]  86.73,115.97 0 bottom
R48  10k  [0603]  86.73,119.97 0 bottom
R49  1k  [0603]  102.73,64.97 90 top
R50  33  [1206_RA]  95.73,43.97 90 top
R51  33  [1206_RA]  95.73,38.97 90 top
R52  33  [1206_RA]  95.73,33.97 90 top
R53  100k  [0603]  116.73,53.97 180 top
R54  300k  [0603]  119.73,54.97 270 top
R55  100k  [0603]  116.73,63.97 0 top
R56  10k  [0603]  116.73,65.97 180 top
R57  10k  [0603]  121.72,95.52 0 bottom
R58  3.3k  [0603]  121.72,92.98 180 bottom
R59  33  [1206_RA]  124.73,36.97 90 top
R60  33  [1206_RA]  124.73,42.97 270 top
R61  10k  [0603]  132.73,45.97 0 top
R62  10k  [0603]  132.73,41.97 0 top
R63  27  [0603]  171.43,50.97 270 top
R64  27  [0603]  173.43,50.97 270 top
R65  10  [0603]  177.29,29.2 0 top
R66  100k  [0603]  177.43,50.97 270 top
R67  5.1k  [0603]  182.43,22.97 180 top
R68  5.1k  [0603]  174.43,22.97 0 top
R69  1k  [0603]  158.11,114.23 90 bottom
R70  100k  [0603]  189.43,107.97 270 bottom
R71  10k  [0603]  156.43,97.97 180 bottom
R72  10k  [0603]  156.43,103.97 0 bottom
R73  5.1k  [0603]  193.43,22.97 180 top
R74  5.1k  [0603]  186.43,22.97 0 top
R75  100k  [0603]  190.43,102.97 180 bottom
R76  470  [0603]  201.43,112.97 0 bottom
R77  150k  [0603]  155.43,117.97 0 bottom
R78  0  [0603]  155.43,115.97 0 bottom
R79  10k  [0603]  155.43,119.97 0 bottom
R80  1k  [0603]  171.43,64.97 90 top
R81  33  [1206_RA]  164.43,43.97 90 top
R82  33  [1206_RA]  164.43,38.97 90 top
R83  33  [1206_RA]  164.43,33.97 90 top
R84  100k  [0603]  185.43,53.97 180 top
R85  300k  [0603]  188.43,54.97 270 top
R86  100k  [0603]  185.43,63.97 0 top
R87  10k  [0603]  185.43,65.97 180 top
R88  10k  [0603]  190.42,95.52 0 bottom
R89  3.3k  [0603]  190.42,92.98 180 bottom
R90  33  [1206_RA]  193.43,36.97 90 top
R91  33  [1206_RA]  193.43,42.97 270 top
R92  10k  [0603]  201.43,45.97 0 top
R93  10k  [0603]  201.43,41.97 0 top
U1  74HC4052D  [SO16]  41.02,66.97 0 top
U2  AP2112K-3.3  [SOT23-5]  41.02,54.97 90 top
U3  AP2112K-3.3  [SOT23-5]  109.73,54.97 90 top
U4  STLQ015-3.3V  [SOT23-5]  41.02,59.97 90 top
U5  ESP-WROOM-3232D  [ESP-WROOM-32D]  41.02,107.97 90 bottom
U6  CH340C  [SO016]  25.02,100.97 270 bottom
U7  MAX17048  [DFN-8]  33.02,59.97 90 top
U8  NC7SZ14-D  [SIP6]  60.02,38.97 90 top
U9  NC7SZ14-D  [SIP6]  60.02,44.97 90 top
U10  MCP73833  [DFN-10]  23.02,113.97 90 bottom
U11  U-BLOX_ZED_F9R  [UBLOX_ZED_F9R]  41.02,38.97 0 top
U12  CH340C  [SO016]  93.73,100.97 270 bottom
U13  LIS2DH12  [LGA-12-LISDH12]  28.02,65.97 90 top
U14  MAX17048  [DFN-8]  101.73,59.97 90 top
U15  STLQ015-3.3V  [SOT23-5]  109.73,59.97 90 top
U16  MCP73833  [DFN-10]  91.73,113.97 90 bottom
U17  74HC4052D  [SO16]  109.73,66.97 0 top
U18  LIS2DH12  [LGA-12-LISDH12]  96.73,65.97 90 top
U19  ESP-WROOM-3232D  [ESP-WROOM-32D]  109.73,107.97 90 bottom
U20  NC7SZ14-D  [SIP6]  128.73,38.97 90 top
U21  NC7SZ14-D  [SIP6]  128.73,44.97 90 top
U22  U-BLOX_ZED_F9R  [UBLOX_ZED_F9R]  109.73,38.97 0 top
U23  AP2112K-3.3  [SOT23-5]  178.43,54.97 90 top
U24  CH340C  [SO016]  162.43,100.97 270 bottom
U25  MAX17048  [DFN-8]  170.43,59.97 90 top
U26  STLQ015-3.3V  [SOT23-5]  178.43,59.97 90 top
U27  MCP73833  [DFN-10]  160.43,113.97 90 bottom
U28  74HC4052D  [SO16]  178.43,66.97 0 top
U29  LIS2DH12  [LGA-12-LISDH12]  165.43,65.97 90 top
U30  ESP-WROOM-3232D  [ESP-WROOM-32D]  178.43,107.97 90 bottom
U31  NC7SZ14-D  [SIP6]  197.43,38.97 90 top
U32  NC7SZ14-D  [SIP6]  197.43,44.97 90 top
U33  U-BLOX_ZED_F9R  [UBLOX_ZED_F9R]  178.43,38.97 0 top
U$1  [V130]  41.02,109.97 0 top
U$2  [QWIIC_4MM]  109.73,19.35 0 bottom
U$3  [#TX_RDY#0]  18.62,41.97 0 bottom
U$4  [INT0]  17.02,72.97 0 top
U$5  [#3V3#0]  60.07,30.56 90 top
U$6  [L1#L20]  29.42,27.97 0 top
U$7  [RTK0]  41.02,65.97 0 bottom
U$8  [OVERLAY0]  58.02,115.97 0 top
U$9  [PWR_BTN1]  12.02,72.97 0 top
U$10  [#RTK#1]  63.55,39.52 0 bottom
U$11  [#PPS#0]  22.52,31.77 0 bottom
U$12  [EXPRESS_PLUS0]  41.02,62.97 0 bottom
U$13  [ACTIVE1]  29.42,26.47 0 top
U$14  [#RX#2]  9.27,43.88 270 bottom
U$15  [ANTENNA2]  29.42,24.97 0 top
U$16  [ZED0]  11.05,43.5 90 bottom
U$17  [##SAFE##5]  22.52,34.37 0 bottom
U$18  [#RTK#1]  132.26,39.52 0 bottom
U$19  [1553DBK-ENCLOSURE]  109.73,65.97 90 top
U$20  [LIPO0]  88.26,110.55 0 top
U$21  [U#BLOX0]  106.81,21.13 0 top
U$22  [EXPRESS_PLUS0]  41.02,112.97 0 top
U$23  [#3#5#5V#0]  14.35,20.4 90 top
U$24  [X0]  25.62,65.97 0 top
U$25  [USB1]  107.69,19.73 0 top
U$26  [1553DBK-ENCLOSURE]  41.02,65.97 90 top
U$27  [LIPO0]  19.56,110.55 0 top
U$28  [##RST##4]  22.62,36.97 0 bottom
U$29  [SERIAL10]  58.93,12.52 90 top
U$30  [QWIIC_4MM]  41.02,19.35 0 bottom
U$31  [SERIAL20]  81.79,12.78 90 top
U$32  [#FENCE#3]  63.55,36.98 0 bottom
U$33  [CHG2]  66.82,100.47 0 bottom
U$34  [GND3]  66.92,97.87 0 bottom
U$35  [U#BLOX0]  38.1,21.13 0 top
U$36  [USB1]  38.99,19.73 0 top
U$37  [SERIAL10]  127.63,12.52 90 top
U$38  [#GND#0]  21.97,20.4 90 top
U$39  [#RX2#2]  19.43,20.4 90 top
U$40  [#TX2#1]  16.89,20.4 90 top
U$41  [PWR0]  66.72,105.47 0 bottom
U$42  [SETUP1]  65.92,102.87 0 bottom
U$43  [SERIAL20]  13.08,12.78 90 top
U$44  [#RX2#2]  88.14,20.4 90 top
U$45  [#RX1#2]  64.51,18.21 90 top
U$46  [#TX1#1]  62.99,18.21 90 top
U$47  [#3V3#0]  61.47,18.21 90 top
U$48  [#GND#0]  66.04,18.21 90 top
U$49  [NMEA1]  68.96,12.52 90 top
U$50  [RADIO0]  23.24,12.78 90 top
U$51  [#TX2#1]  85.6,20.4 90 top
U$52  [#RX1#2]  133.22,18.21 90 top
U$53  [#TX1#1]  131.7,18.21 90 top
U$54  [#3V3#0]  130.17,18.21 90 top
U$55  [Y1]  23.02,68.57 0 top
U$56  [Z2]  22.92,64.37 180 top
U$57  [#GND#0]  134.75,18.21 90 top
U$58  [#GND#0]  90.68,20.4 90 top
U$59  [NMEA1]  137.67,12.52 90 top
U$60  [#ESP_RST#0]  68.96,110.68 0 bottom
U$61  [RADIO0]  91.95,12.78 90 top
U$62  [##RST##4]  91.33,36.97 0 bottom
U$63  [##SAFE##5]  91.23,34.37 0 bottom
U$64  [#FENCE#3]  132.26,36.98 0 bottom
U$65  [#TX1#1]  62.61,30.56 90 top
U$66  [USB1]  50.42,19.73 0 top
U$67  [ESP320]  49.53,21.13 0 top
U$68  [#RX1#2]  65.15,30.56 90 top
U$69  [#3#5#5V#0]  83.06,20.4 90 top
U$70  [#GND#2]  8.96,57.27 90 bottom
U$71  [#PPS#0]  91.23,31.77 0 bottom
U$72  [#TX#1]  9.27,50.99 270 bottom
U$73  [#RX#2]  77.98,43.88 270 bottom
U$74  [RTK0]  41.02,115.97 0 top
U$75  [ZED0]  79.75,43.5 90 bottom
U$76  [#TX#1]  77.98,50.99 270 bottom
U$77  [USB1]  119.12,19.73 0 top
U$78  [ESP320]  118.24,21.13 0 top
U$79  [#3V3#0]  128.78,30.56 90 top
U$80  [#TX1#1]  131.32,30.56 90 top
U$81  [#RX1#2]  133.86,30.56 90 top
U$82  [#GND#0]  67.69,30.56 90 top
U$83  [MICROSD0]  68.76,24.91 270 bottom
U$84  [#GND#1]  68.96,108.14 0 bottom
U$85  [#3V3#2]  11.56,57.27 90 bottom
U$86  [#SCL#1]  16.66,57.47 90 bottom
U$87  [#SDA#0]  14.06,57.27 90 bottom
U$88  [#D_SEL#0]  19.42,39.37 0 bottom
U$89  [#GND#0]  136.4,30.56 90 top
U$90  [MICROSD0]  137.46,24.91 270 bottom
U$91  [#GND#1]  137.67,108.14 0 bottom
U$92  [#ESP_RST#0]  137.67,110.68 0 bottom
U$93  [QWIIC_4MM]  12.02,57.67 0 top
U$94  [RTK0]  109.73,115.97 0 top
U$95  [RTK0]  109.73,65.97 0 bottom
U$96  [#GND#2]  77.67,57.27 90 bottom
U$97  [#3V3#2]  80.27,57.27 90 bottom
U$98  [#SCL#1]  85.37,57.47 90 bottom
U$99  [#SDA#0]  82.77,57.27 90 bottom
U$100  [#D_SEL#0]  88.13,39.37 0 bottom
U$101  [QWIIC_4MM]  80.73,57.67 0 top
U$102  [#TX_RDY#0]  87.33,41.97 0 bottom
U$103  [CHG2]  135.53,100.47 0 bottom
U$104  [GND3]  135.63,97.87 0 bottom
U$105  [PWR0]  135.43,105.47 0 bottom
U$106  [SETUP1]  134.63,102.87 0 bottom
U$107  [X0]  94.33,65.97 0 top
U$108  [Y1]  91.73,68.57 0 top
U$109  [Z2]  91.63,64.37 180 top
U$110  [INT0]  85.73,72.97 0 top
U$111  [PWR_BTN1]  80.73,72.97 0 top
U$112  [OVERLAY0]  126.73,115.97 0 top
U$113  [L1#L20]  98.13,27.97 0 top
U$114  [ACTIVE1]  98.13,26.47 0 top
U$115  [ANTENNA2]  98.13,24.97 0 top
U$116  [EXPRESS_PLUS0]  109.73,62.97 0 bottom
U$117  [EXPRESS_PLUS0]  109.73,112.97 0 top
U$118  [V130]  109.73,109.97 0 top
U$119  [QWIIC_4MM]  178.43,19.35 0 bottom
U$120  [#RTK#1]  200.96,39.52 0 bottom
U$121  [1553DBK-ENCLOSURE]  178.43,65.97 90 top
U$122  [LIPO0]  156.97,110.55 0 top
U$123  [U#BLOX0]  175.51,21.13 0 top
U$124  [USB1]  176.4,19.73 0 top
U$125  [SERIAL20]  150.49,12.78 90 top
U$126  [SERIAL10]  196.34,12.52 90 top
U$127  [#RX2#2]  156.84,20.4 90 top
U$128  [#TX2#1]  154.3,20.4 90 top
U$129  [#RX1#2]  201.93,18.21 90 top
U$130  [#TX1#1]  200.4,18.21 90 top
U$131  [#3V3#0]  198.88,18.21 90 top
U$132  [#GND#0]  203.45,18.21 90 top
U$133  [#GND#0]  159.38,20.4 90 top
U$134  [NMEA1]  206.37,12.52 90 top
U$135  [RADIO0]  160.65,12.78 90 top
U$136  [##RST##4]  160.03,36.97 0 bottom
U$137  [##SAFE##5]  159.93,34.37 0 bottom
U$138  [#FENCE#3]  200.96,36.98 0 bottom
U$139  [#3#5#5V#0]  151.76,20.4 90 top
U$140  [#PPS#0]  159.93,31.77 0 bottom
U$141  [#RX#2]  146.68,43.88 270 bottom
U$142  [ZED0]  148.46,43.5 90 bottom
U$143  [#TX#1]  146.68,50.99 270 bottom
U$144  [USB1]  187.83,19.73 0 top
U$145  [ESP320]  186.94,21.13 0 top
U$146  [#3V3#0]  197.48,30.56 90 top
U$147  [#TX1#1]  200.02,30.56 90 top
U$148  [#RX1#2]  202.56,30.56 90 top
U$149  [#GND#0]  205.1,30.56 90 top
U$150  [MICROSD0]  206.17,24.91 270 bottom
U$151  [#GND#1]  206.37,108.14 0 bottom
U$152  [#ESP_RST#0]  206.37,110.68 0 bottom
U$153  [RTK0]  178.43,115.97 0 top
U$154  [RTK0]  178.43,65.97 0 bottom
U$155  [#GND#2]  146.37,57.27 90 bottom
U$156  [#3V3#2]  148.97,57.27 90 bottom
U$157  [#SCL#1]  154.07,57.47 90 bottom
U$158  [#SDA#0]  151.47,57.27 90 bottom
U$159  [#D_SEL#0]  156.83,39.37 0 bottom
U$160  [QWIIC_4MM]  149.43,57.67 0 top
U$161  [#TX_RDY#0]  156.03,41.97 0 bottom
U$162  [CHG2]  204.23,100.47 0 bottom
U$163  [GND3]  204.33,97.87 0 bottom
U$164  [PWR0]  204.13,105.47 0 bottom
U$165  [SETUP1]  203.33,102.87 0 bottom
U$166  [X0]  163.03,65.97 0 top
U$167  [Y1]  160.43,68.57 0 top
U$168  [Z2]  160.33,64.37 180 top
U$169  [INT0]  154.43,72.97 0 top
U$170  [PWR_BTN1]  149.43,72.97 0 top
U$171  [OVERLAY0]  195.43,115.97 0 top
U$172  [L1#L20]  166.83,27.97 0 top
U$173  [ACTIVE1]  166.83,26.47 0 top
U$174  [ANTENNA2]  166.83,24.97 0 top
U$175  [EXPRESS_PLUS0]  178.43,62.97 0 bottom
U$176  [EXPRESS_PLUS0]  178.43,112.97 0 top
U$177  [V130]  178.43,109.97 0 top

## Library data of the parts
BT1-BT3 = SparkFun-Batteries; PROD_ID: BATT-13243; SF_SKU: PRT-13813
C1 C30 C56 = SparkFun-Capacitors; PROD_ID: CAP-15063
C2 C4 C6 C17 C18 C24 C26 C31 C42 C43 C53 C55 C57 C68 C69 = SparkFun-Capacitors; PROD_ID: CAP-13930
C3 C11-C13 C15 C16 C21 C27-C29 C36-C38 C40 C41 C44 C48 C50-C52 C62-C64 C66 C67 C70 C74 C76-C78 = SparkFun-Capacitors; PROD_ID: CAP-00810
C5 C7 C22 C23 C25 C32 C46 C47 C54 C58 C72 C73 = SparkFun-Capacitors; PROD_ID: CAP-08604
C8 C9 C33 C34 C59 C60 = SparkFun-Capacitors; PROD_ID: CAP-14106
C10 C14 C19 C20 C35 C39 C45 C49 C61 C65 C71 C75 = SparkFun-Capacitors; PROD_ID: CAP-11015
D1 D12 D19 = SparkFun-DiscreteSemi; PROD_ID: DIO-09646
D2 D4 D6 D11 D15 D18 = SparkFun-IC-Power; PROD_ID: DIO-14084
D3 D5 D7-D9 D13 D16 D17 D20 = SparkFun-DiscreteSemi; PROD_ID: DIO-14072
D10 D14 D21 = SparkFun-DiscreteSemi; DIGIKEY_PART: PESD0402-140CT-ND; MOUSE_PART: 650-PESD0402-140; PROD_ID: DIO-15359
E1-E3 = SparkFun-RF; PROD_ID: CONN-08289
E$1-E$4 JP2-JP5 JP7-JP10 JP21 JP61 JP71 JP81 LOGO1-LOGO9 U$2 U$30 U$93 U$101 U$119 U$160 = SparkFun-Aesthetics
E$5 E$6 = SparkFun-Retired
FB1-FB3 = SparkFun-Coils; PROD_ID: NDUC-15072
J1 J6 J7 J10-J12 J14 J15 J17 J18 J23 J27-J31 J33-J36 J42 J46-J50 J52-J55 = SparkFun-Connectors
J2 J9 J25 J26 J44 J45 = SparkFun-Connectors; PROD_ID: CONN-15303
J3 J5 J21 J24 J40 J43 = SparkFun-Connectors; PROD_ID: CONN-14122
J4 J20 J39 = SparkFun-Connectors; PROD_ID: CONN-13694; VALUE: Qwiic Right Angle
J8 J22 J41 = SparkFun-Connectors; PROD_ID: CONN-11443; SF_ID: PRT-08612
J13 J32 J51 = SparkFun-Connectors; PROD_ID: CONN-13694
J16 J37 J56 = SparkFun-Connectors; PROD_ID: CONN-16110
J19 J38 J57 = SparkFun-Connectors; PROD_ID: CONN-16692
JP1 JP6 JP11 MEAS MEAS1-MEAS5 = SparkFun-Jumpers
Q1 Q4 Q6 = SparkFun-DiscreteSemi; PROD_ID: TRANS-15717
Q2 Q3 Q5 = SparkFun-DiscreteSemi; PROD_ID: TRANS-13337
R1 R45 R76 = SparkFun-Resistors; PROD_ID: RES-07869
R2-R4 R9 R25 R50-R52 R59 R60 R81-R83 R90 R91 = SparkFun-Resistors; PROD_ID: RES-15081
R5 R47 R78 = SparkFun-Resistors; PROD_ID: RES-08609
R6 R8 R23 R29 R31 R33 R40 R41 R56 R57 R61 R62 R71 R72 R87 R88 R92 R93 = SparkFun-Resistors; PROD_ID: RES-00824
R7 R19 R36 R49 R69 R80 = SparkFun-Resistors; PROD_ID: RES-07856
R10 R11 R27 R28 R63 R64 = SparkFun-Resistors; PROD_ID: RES-09334
R12 R14 R65 = SparkFun-Resistors; PROD_ID: RES-12581
R13 R15 R20-R22 R26 R39 R44 R53 R55 R66 R70 R75 R84 R86 = SparkFun-Resistors; PROD_ID: RES-07828
R16 R17 R32 R35 R37 R38 R42 R43 R67 R68 R73 R74 = SparkFun-Resistors; PROD_ID: RES-12083
R18 R48 R79 = SparkFun-Resistors; PROD_ID: RES-13608
R24 R54 R85 = SparkFun-Resistors; PROD_ID: RES-10809
R30 R46 R77 = SparkFun-Resistors; PROD_ID: RES-09117
R34 R58 R89 = SparkFun-Resistors; PROD_ID: RES-07851
U1 U17 U28 = SparkFun-IC-Logic; PROD_ID: IC-13103
U2 U3 U23 = SparkFun-IC-Power; PROD_ID: VREG-12457; VALUE: 3.3V
U4 U15 U26 = SparkFun-IC-Power; PROD_ID: IC-15779
U5 U19 U30 = SparkFun-RF; PROD_ID: IC-15676
U6 U12 U24 = SparkFun-IC-Comms; PROD_ID: IC-14038
U7 U14 U25 = SparkFun-IC-Power; PROD_ID: IC-12551
U8 U9 U20 U21 U31 U32 = SparkFun-IC-Amplifiers; PROD_ID: IC-15068
U10 U16 U27 = SparkFun-IC-Power; PROD_ID: IC-14369
U11 U22 U33 = SparkFun-GPS; PROD_ID: IC-14716
U13 U18 U29 = SparkFun-Sensors; DIGIKEY: 497-14851-2-ND; PROD_ID: IC-14229
U$1 U$3-U$18 U$20-U$25 U$27-U$29 U$31-U$92 U$94-U$100 U$102-U$118 U$120 U$122-U$159 U$161-U$177 = output
U$19 U$26 U$121 = SparkFun GPS RTK Surveyor

## Nets
3.3V [power]: C2.1 C3.1 C4.1 C5.2 C7.2 C10.1 C11.1 C13.1 C14.1 C16.1 C19.1 C27.1 C28.1 C29.1 J2.1 J4.2 J12.4 J13.2 J16.4 J17.2 R6.2 R8.2 R13.2 R15.2 R20.2 R34.2 U1.16 U2.5 U5.2 U6.4 U6.16 U8.P6 U9.P6 U11.P33 U11.P34 U11.P38 U13.2 U13.3 U13.9 U13.10
3.3V1 [power]: C24.1 C25.2 C31.1 C32.2 C35.1 C36.1 C38.1 C39.1 C40.1 C44.1 C48.1 C49.1 C51.1 C52.1 J20.2 J26.1 J28.4 J31.2 J32.2 J37.4 R21.2 R39.2 R44.2 R58.2 R61.2 R62.2 U3.5 U12.4 U12.16 U17.16 U18.2 U18.3 U18.9 U18.10 U19.2 U20.P6 U21.P6 U22.P33 U22.P34 U22.P38
3.3V2 [power]: C53.1 C54.2 C57.1 C58.2 C61.1 C62.1 C64.1 C65.1 C66.1 C70.1 C74.1 C75.1 C77.1 C78.1 J39.2 J45.1 J47.4 J50.2 J51.2 J56.4 R66.2 R70.2 R75.2 R89.2 R92.2 R93.2 U23.5 U24.4 U24.16 U28.16 U29.2 U29.3 U29.9 U29.10 U30.2 U31.P6 U32.P6 U33.P33 U33.P34 U33.P38
ANT_VCC: C1.1 FB1.2 R14.1
ANT_VCC1: C30.1 FB2.2 R12.1
ANT_VCC2: C56.1 FB3.2 R65.1
CC1: J5.A5 R17.2
CC2: J5.B5 R16.2
CC3: J3.B5 R37.2
CC4: J3.A5 R38.2
CC5: J21.A5 R35.2
CC6: J21.B5 R32.2
CC7: J24.B5 R42.2
CC8: J24.A5 R43.2
CC9: J40.A5 R68.2
CC10: J40.B5 R67.2
CC11: J43.B5 R73.2
CC12: J43.A5 R74.2
CHG_LED: R1.2 U10.3
CHG_LED1: R45.2 U16.3
CHG_LED2: R76.2 U27.3
CHG_LED_RES: J7.2 J19.2 R1.1
CHG_LED_RES1: J34.2 J38.2 R45.1
CHG_LED_RES2: J53.2 J57.2 R76.1
CHG_THERM1: R5.2 R18.2 R30.2
CHG_THERM2: R46.2 R47.2 R48.2
CHG_THERM3: R77.2 R78.2 R79.2
D+: D6.4 R27.1
D+1: D2.4 U6.5
D+2: D4.4 R10.1
D+3: D11.4 U12.5
D+4: D15.4 R63.1
D+5: D18.4 U24.5
D-: D6.6 R28.1
D-1: D2.6 U6.6
D-2: D4.6 R11.1
D-3: D11.6 U12.6
D-4: D15.6 R64.1
D-5: D18.6 U24.6
ESP32_!DTR: Q2.1 R23.1 U6.13
ESP32_!DTR1: Q3.1 R40.1 U12.13
ESP32_!DTR2: Q5.1 R71.1 U24.13
ESP32_!RTS: Q2.4 R29.1 U6.14
ESP32_!RTS1: Q3.4 R41.1 U12.14
ESP32_!RTS2: Q5.4 R72.1 U24.14
ESP32_EN: C12.1 J14.1 Q2.3 R20.1 U5.3
ESP32_EN1: C37.1 J30.1 Q3.3 R39.1 U19.3
ESP32_EN2: C63.1 J49.1 Q5.3 R70.1 U30.3
ESP32_RXI: U5.34 U6.2
ESP32_RXI1: U12.2 U19.34
ESP32_RXI2: U24.2 U30.34
ESP32_TXO: U5.35 U6.3
ESP32_TXO1: U12.3 U19.35
ESP32_TXO2: U24.3 U30.35
ESP_0/BOOT: Q2.6 U5.25
ESP_0/BOOT1: Q3.6 U19.25
ESP_0/BOOT2: Q5.6 U30.25
ESP_1: U19.29
ESP_2: U19.14
ESP_2/MUX_A: U1.10 U5.24
ESP_2/MUX_A1: U17.10 U19.24
ESP_2/MUX_A2: U28.10 U30.24
ESP_3: U19.23
ESP_4: U19.9
ESP_4/ACCEL_INT: J18.1 JP1.1 U13.12
ESP_4/ACCEL_INT1: J35.1 JP6.1 U18.12
ESP_4/ACCEL_INT2: J54.1 JP11.1 U29.12
ESP_4/MUX_B: U1.9 U5.26
ESP_4/MUX_B1: U17.9 U19.26
ESP_4/MUX_B2: U28.9 U30.26
ESP_5: U5.29
ESP_6: U19.8
ESP_7: U30.29
ESP_8: U30.14
ESP_9: U30.23
ESP_10: U30.9
ESP_11: U30.8
ESP_12: U5.14
ESP_13/POWER_CTRL: D1.A R22.1 R24.2 U5.16
ESP_13/POWER_CTRL1: D12.A R53.1 R54.2 U19.16
ESP_13/POWER_CTRL2: D19.A R84.1 R85.2 U30.16
ESP_14/SETUP_BUTTON: C21.1 J7.3 J19.4 U5.13
ESP_14/SETUP_BUTTON1: C50.1 J34.3 J38.4 U19.13
ESP_14/SETUP_BUTTON2: C76.1 J53.3 J57.4 U30.13
ESP_15: U5.23
ESP_18/SCK: J16.5 U5.30
ESP_18/SCK1: J37.5 U19.30
ESP_18/SCK2: J56.5 U30.30
ESP_19/POCI: J16.7 U5.31
ESP_19/POCI1: J37.7 U19.31
ESP_19/POCI2: J56.7 U30.31
ESP_21/SDA: J4.3 J13.3 J17.3 R2.P7 U5.33 U7.8 U13.4
ESP_21/SDA1: J20.3 J31.3 J32.3 R50.P7 U14.8 U18.4 U19.33
ESP_21/SDA2: J39.3 J50.3 J51.3 R81.P7 U25.8 U29.4 U30.33
ESP_22/SCL: J4.4 J13.4 J17.4 R2.P8 U5.36 U7.7 U13.1
ESP_22/SCL1: J20.4 J31.4 J32.4 R50.P8 U14.7 U18.1 U19.36
ESP_22/SCL2: J39.4 J50.4 J51.4 R81.P8 U25.7 U29.1 U30.36
ESP_23/PICO: J16.3 U5.37
ESP_23/PICO1: J37.3 U19.37
ESP_23/PICO2: J56.3 U30.37
ESP_25/SD_!CS!: J16.2 R13.1 U5.10
ESP_25/SD_!CS!1: J37.2 R44.1 U19.10
ESP_25/SD_!CS!2: J56.2 R75.1 U30.10
ESP_26/DAC1: U17.11 U19.11
ESP_26/DAC2: U1.11 U5.11
ESP_26/DAC3: U28.11 U30.11
ESP_26/ZED_TX_READY_LV: R3.P4 U11.P46
ESP_26/ZED_TX_READY_LV1: R51.P4 U22.P46
ESP_26/ZED_TX_READY_LV2: R82.P4 U33.P46
ESP_27/FAST_OFF: C20.2 Q1.G1 R24.1 U5.12
ESP_27/FAST_OFF1: C45.2 Q4.G1 R54.1 U19.12
ESP_27/FAST_OFF2: C71.2 Q6.G1 R85.1 U30.12
ESP_32: U5.8
ESP_33: U5.9
ESP_D1+: D2.3 J3.A6 J3.B6
ESP_D1+1: D11.3 J24.A6 J24.B6
ESP_D1+2: D18.3 J43.A6 J43.B6
ESP_D1-: D2.1 J3.A7 J3.B7
ESP_D1-1: D11.1 J24.A7 J24.B7
ESP_D1-2: D18.1 J43.A7 J43.B7
ESP_I1: U19.4
ESP_I2: U30.4
ESP_I16/ZED-TXO1: J15.1 R2.P5 U1.12 U5.27
ESP_I16/ZED-TXO2: J29.1 R50.P5 U17.12 U19.27
ESP_I16/ZED-TXO3: J48.1 R81.P5 U28.12 U30.27
ESP_I34/ZED_TX_READY: J6.1 R3.P5 U5.6
ESP_I34/ZED_TX_READY1: J33.1 R51.P5 U19.6
ESP_I34/ZED_TX_READY2: J52.1 R82.P5 U30.6
ESP_I35/DEVICE_SENSE: R33.2 R34.1 U5.7
ESP_I35/DEVICE_SENSE1: R57.2 R58.1 U19.7
ESP_I35/DEVICE_SENSE2: R88.2 R89.1 U30.7
ESP_I36: U5.4
ESP_I39/ADC1: U17.4 U19.5
ESP_I39/ADC2: U28.4 U30.5
ESP_I39/ADC39: U1.4 U5.5
ESP_O17/ZED-RXI1: J15.2 R2.P6 R19.2 U1.1
ESP_O17/ZED-RXI2: J29.2 R49.2 R50.P6 U17.1
ESP_O17/ZED-RXI3: J48.2 R80.2 R81.P6 U28.1
EXT_DIR: R6.1 U1.15 U9.P2
EXT_DIR1: R61.1 U17.15 U21.P2
EXT_DIR2: R92.1 U28.15 U32.P2
EXT_WT: R8.1 U1.2 U8.P2
EXT_WT1: R62.1 U17.2 U20.P2
EXT_WT2: R93.1 U28.2 U31.P2
EXTERNAL_DATA_IN: J2.3 J12.2 U1.3
EXTERNAL_DATA_IN1: J26.3 J28.2 U17.3
EXTERNAL_DATA_IN2: J45.3 J47.2 U28.3
EXTERNAL_DATA_OUT: J2.2 J12.3 U1.13
EXTERNAL_DATA_OUT1: J26.2 J28.3 U17.13
EXTERNAL_DATA_OUT2: J45.2 J47.3 U28.13
EXTINT_LV: R9.P2 U11.P51
EXTINT_LV1: R52.P2 U22.P51
EXTINT_LV2: R83.P2 U33.P51
FENCE_LV: R25.P6 U11.P19
FENCE_LV1: R59.P6 U22.P19
FENCE_LV2: R90.P6 U33.P19
GND: C1.2 C2.2 C3.2 C4.2 C5.1 C6.2 C7.1 C8.2 C9.2 C10.2 C11.2 C12.2 C13.2 C14.2 C15.2 C16.2 C17.2 C18.2 C19.2 C21.2 C27.2 C28.2 C29.2 D2.2 D6.2 D10.2 E1.GND@0 E1.GND@1 E1.GND@2 E1.GND@3 J2.4 J3.GND J3.GND2 J3.SHLD1 J3.SHLD2 J3.SHLD3 J3.SHLD4 J4.1 J5.GND J5.GND2 J5.SHLD1 J5.SHLD2 J5.SHLD3 J5.SHLD4 J7.1 J8.1 J9.4 J10.2 J11.1 J12.1 J13.1 J14.2 J16.6 J16.10 J16.11 J16.12 J16.13 J17.1 J19.6 Q1.S1 R7.1 R15.1 R16.1 R17.1 R18.1 R30.1 R33.1 R37.1 R38.1 U1.6 U1.7 U1.8 U2.2 U4.2 U5.1 U5.15 U5.38 U5.GND U5.GNDT1 U5.GNDT2 U5.GNDT3 U5.GNDT4 U5.GNDT5 U5.GNDT6 U5.GNDT7 U5.GNDT8 U6.1 U7.1 U7.4 U7.6 U7.9 U8.P3 U9.P3 U10.5 U10.11 U11.G1 U11.G2 U11.G3 U11.G4 U11.G5 U11.G6 U11.G7 U11.G8 U11.G9 U11.G10 U11.G11 U11.G12 U11.G13 U11.G14 U11.G15 U11.G16 U11.G17 U11.G18 U11.G19 U11.G20 U11.G21 U11.G22 U11.G23 U11.G24 U11.G25 U11.G26 U11.G27 U11.G28 U11.G29 U11.G30 U11.G31 U11.G32 U11.G33 U11.G34 U11.G35 U11.G36 U11.G37 U11.G38 U11.G39 U11.G40 U11.G41 U11.G42 U11.G43 U11.G44 U11.G45 U11.G46 U11.G47 U11.G48 U11.P1 U11.P3 U11.P12 U11.P14 U11.P32 U11.P37 U11.P41 U11.P48 U13.5 U13.6 U13.7 U13.8
GND1: C24.2 C25.1 C26.2 C30.2 C31.2 C32.1 C33.2 C34.2 C35.2 C36.2 C37.2 C38.2 C39.2 C40.2 C41.2 C42.2 C43.2 C44.2 C48.2 C49.2 C50.2 C51.2 C52.2 D4.2 D11.2 D14.2 E2.GND@0 E2.GND@1 E2.GND@2 E2.GND@3 J20.1 J21.GND J21.GND2 J21.SHLD1 J21.SHLD2 J21.SHLD3 J21.SHLD4 J22.1 J23.2 J24.GND J24.GND2 J24.SHLD1 J24.SHLD2 J24.SHLD3 J24.SHLD4 J25.4 J26.4 J27.1 J28.1 J30.2 J31.1 J32.1 J34.1 J37.6 J37.10 J37.11 J37.12 J37.13 J38.6 Q4.S1 R21.1 R32.1 R35.1 R36.1 R42.1 R43.1 R46.1 R48.1 R57.1 U3.2 U12.1 U14.1 U14.4 U14.6 U14.9 U15.2 U16.5 U16.11 U17.6 U17.7 U17.8 U18.5 U18.6 U18.7 U18.8 U19.1 U19.15 U19.38 U19.GND U19.GNDT1 U19.GNDT2 U19.GNDT3 U19.GNDT4 U19.GNDT5 U19.GNDT6 U19.GNDT7 U19.GNDT8 U20.P3 U21.P3 U22.G1 U22.G2 U22.G3 U22.G4 U22.G5 U22.G6 U22.G7 U22.G8 U22.G9 U22.G10 U22.G11 U22.G12 U22.G13 U22.G14 U22.G15 U22.G16 U22.G17 U22.G18 U22.G19 U22.G20 U22.G21 U22.G22 U22.G23 U22.G24 U22.G25 U22.G26 U22.G27 U22.G28 U22.G29 U22.G30 U22.G31 U22.G32 U22.G33 U22.G34 U22.G35 U22.G36 U22.G37 U22.G38 U22.G39 U22.G40 U22.G41 U22.G42 U22.G43 U22.G44 U22.G45 U22.G46 U22.G47 U22.G48 U22.P1 U22.P3 U22.P12 U22.P14 U22.P32 U22.P37 U22.P41 U22.P48
GND2: C53.2 C54.1 C55.2 C56.2 C57.2 C58.1 C59.2 C60.2 C61.2 C62.2 C63.2 C64.2 C65.2 C66.2 C67.2 C68.2 C69.2 C70.2 C74.2 C75.2 C76.2 C77.2 C78.2 D15.2 D18.2 D21.2 E3.GND@0 E3.GND@1 E3.GND@2 E3.GND@3 J39.1 J40.GND J40.GND2 J40.SHLD1 J40.SHLD2 J40.SHLD3 J40.SHLD4 J41.1 J42.2 J43.GND J43.GND2 J43.SHLD1 J43.SHLD2 J43.SHLD3 J43.SHLD4 J44.4 J45.4 J46.1 J47.1 J49.2 J50.1 J51.1 J53.1 J56.6 J56.10 J56.11 J56.12 J56.13 J57.6 Q6.S1 R66.1 R67.1 R68.1 R69.1 R73.1 R74.1 R77.1 R79.1 R88.1 U23.2 U24.1 U25.1 U25.4 U25.6 U25.9 U26.2 U27.5 U27.11 U28.6 U28.7 U28.8 U29.5 U29.6 U29.7 U29.8 U30.1 U30.15 U30.38 U30.GND U30.GNDT1 U30.GNDT2 U30.GNDT3 U30.GNDT4 U30.GNDT5 U30.GNDT6 U30.GNDT7 U30.GNDT8 U31.P3 U32.P3 U33.G1 U33.G2 U33.G3 U33.G4 U33.G5 U33.G6 U33.G7 U33.G8 U33.G9 U33.G10 U33.G11 U33.G12 U33.G13 U33.G14 U33.G15 U33.G16 U33.G17 U33.G18 U33.G19 U33.G20 U33.G21 U33.G22 U33.G23 U33.G24 U33.G25 U33.G26 U33.G27 U33.G28 U33.G29 U33.G30 U33.G31 U33.G32 U33.G33 U33.G34 U33.G35 U33.G36 U33.G37 U33.G38 U33.G39 U33.G40 U33.G41 U33.G42 U33.G43 U33.G44 U33.G45 U33.G46 U33.G47 U33.G48 U33.P1 U33.P3 U33.P12 U33.P14 U33.P32 U33.P37 U33.P41 U33.P48
GPS_ANT1 [RF]: D10.1 E1.SIG FB1.1 U11.P2
GPS_ANT2 [RF]: D14.1 E2.SIG FB2.1 U22.P2
GPS_ANT3 [RF]: D21.1 E3.SIG FB3.1 U33.P2
LIPO_RAW: J8.2 MEAS1.1 MEAS1.3
LIPO_RAW1: J22.2 MEAS3.1 MEAS3.3
LIPO_RAW2: J41.2 MEAS5.1 MEAS5.3
N$1: R10.2 U22.P40
N$2: R4.P4 U11.P22
N$3: R4.P3 U11.P23
N$4 [power]: J5.VBUS1 J5.VBUS2 MEAS.1 MEAS.3
N$5: R5.1 U10.8
N$6: R19.1 U5.28
N$7: R11.2 U22.P39
N$8: R12.2 U22.P7
N$9: Q3.5 R40.2
N$10: Q3.2 R41.2
N$11: R27.2 U11.P40
N$12: R28.2 U11.P39
N$13: R14.2 U11.P7
N$14 [power]: D8.A J24.VBUS1 J24.VBUS2
N$15: C22.1 C23.2 Q1.D1 Q1.G2 R26.1
N$16 [power]: J21.VBUS1 J21.VBUS2 MEAS2.1 MEAS2.3
N$17: R47.1 U16.8
N$18: R49.1 U19.28
N$19: C46.1 C47.2 Q4.D1 Q4.G2 R55.1
N$20: R60.P4 U22.P22
N$21: R60.P3 U22.P23
N$22: R63.2 U33.P40
N$23: R64.2 U33.P39
N$24: Q2.5 R23.2
N$25: Q2.2 R29.2
N$26: R65.2 U33.P7
N$27: Q5.5 R71.2
N$28: Q5.2 R72.2
N$29 [power]: D17.A J43.VBUS1 J43.VBUS2
N$30 [power]: J40.VBUS1 J40.VBUS2 MEAS4.1 MEAS4.3
N$31: R78.1 U27.8
N$32 [power]: D9.A J3.VBUS1 J3.VBUS2
N$33: R80.1 U30.28
N$34: C72.1 C73.2 Q6.D1 Q6.G2 R86.1
N$35: R91.P4 U33.P22
N$36: R91.P3 U33.P23
POWER_BTN: C23.1 D1.C J7.4 J19.5 JP1.2 R31.1
POWER_BTN1: C47.1 D12.C J34.4 J38.5 JP6.2 R56.1
POWER_BTN2: C73.1 D19.C J53.4 J57.5 JP11.2 R87.1
PPS_LV: R9.P1 U11.P53
PPS_LV1: R52.P1 U22.P53
PPS_LV2: R83.P1 U33.P53
PROG1: R7.2 U10.6
PROG2: R36.2 U16.6
PROG3: R69.2 U27.6
RTK_STAT_LV: R25.P5 U11.P20
RTK_STAT_LV1: R59.P5 U22.P20
RTK_STAT_LV2: R90.P5 U33.P20
RX2_LV: R4.P2 U11.P26
RX2_LV1: R60.P2 U22.P26
RX2_LV2: R91.P2 U33.P26
RXLV: R2.P3 U11.P43
RXLV1: R50.P3 U22.P43
RXLV2: R81.P3 U33.P43
SCL_LV: R2.P1 U11.P45
SCL_LV1: R50.P1 U22.P45
SCL_LV2: R81.P1 U33.P45
SDA_LV: R2.P2 U11.P44
SDA_LV1: R50.P2 U22.P44
SDA_LV2: R81.P2 U33.P44
TX2_LV: R4.P1 U11.P27
TX2_LV1: R60.P1 U22.P27
TX2_LV2: R91.P1 U33.P27
TXLV: R2.P4 U11.P42
TXLV1: R50.P4 U22.P42
TXLV2: R81.P4 U33.P42
UNP_D+: D6.3 J5.A6 J5.B6
UNP_D+1: D4.3 J21.A6 J21.B6
UNP_D+2: D15.3 J40.A6 J40.B6
UNP_D-: D6.1 J5.A7 J5.B7
UNP_D-1: D4.1 J21.A7 J21.B7
UNP_D-2: D15.1 J40.A7 J40.B7
V_BATT [power]: C8.1 C15.1 C17.1 D7.A J10.1 MEAS1.2 MEAS1.4 U4.1 U4.3 U7.2 U7.3 U10.9 U10.10
V_BATT1 [power]: C33.1 C41.1 C42.1 D5.A J23.1 MEAS3.2 MEAS3.4 U14.2 U14.3 U15.1 U15.3 U16.9 U16.10
V_BATT2 [power]: C59.1 C67.1 C68.1 D16.A J42.1 MEAS5.2 MEAS5.4 U25.2 U25.3 U26.1 U26.3 U27.9 U27.10
V_BKCP [power]: C18.1 U4.5 U11.P36
V_BKCP1 [power]: C43.1 U15.5 U22.P36
V_BKCP2 [power]: C69.1 U26.5 U33.P36
V_RAW [power]: C9.1 C22.2 D3.C D7.C Q1.S2 R26.2 R31.2 U10.1 U10.2
V_RAW1 [power]: C34.1 C46.2 D5.C D13.C Q4.S2 R55.2 R56.2 U16.1 U16.2
V_RAW2 [power]: C60.1 C72.2 D16.C D20.C Q6.S2 R86.2 R87.2 U27.1 U27.2
V_USB [power]: D2.5 D3.A D6.5 D9.C J19.1 MEAS.2 MEAS.4
V_USB1 [power]: D4.5 D8.C D11.5 D13.A J38.1 MEAS2.2 MEAS2.4
V_USB2 [power]: D15.5 D17.C D18.5 D20.A J57.1 MEAS4.2 MEAS4.4
VOUT: C6.1 C20.1 J9.1 J11.4 Q1.D2 R22.2 U2.1 U2.3
VOUT1: C26.1 C45.1 J25.1 J27.4 Q4.D2 R53.2 U3.1 U3.3
VOUT2: C55.1 C71.1 J44.1 J46.4 Q6.D2 R84.2 U23.1 U23.3
ZED-RXI1: J25.3 J27.2 R60.P7
ZED-RXI2: J9.3 J11.2 R4.P7
ZED-RXI3: J44.3 J46.2 R91.P7
ZED-TXO1: J25.2 J27.3 R60.P8
ZED-TXO2: J9.2 J11.3 R4.P8
ZED-TXO3: J44.2 J46.3 R91.P8
ZED_!RESET!: J6.3 R3.P7
ZED_!RESET!1: J33.3 R51.P7
ZED_!RESET!2: J52.3 R82.P7
ZED_!RESET!_LV: R3.P2 U11.P49
ZED_!RESET!_LV1: R51.P2 U22.P49
ZED_!RESET!_LV2: R82.P2 U33.P49
ZED_!SAFE!: J6.4 R3.P8
ZED_!SAFE!1: J33.4 R51.P8
ZED_!SAFE!2: J52.4 R82.P8
ZED_!SAFE!_LV: R3.P1 U11.P50
ZED_!SAFE!_LV1: R51.P1 U22.P50
ZED_!SAFE!_LV2: R82.P1 U33.P50
ZED_D_SEL: J6.2 R3.P6
ZED_D_SEL1: J33.2 R51.P6
ZED_D_SEL2: J52.2 R82.P6
ZED_D_SEL_LV: R3.P3 U11.P47
ZED_D_SEL_LV1: R51.P3 U22.P47
ZED_D_SEL_LV2: R82.P3 U33.P47
ZED_DIR: R4.P6 U9.P4
ZED_DIR1: R60.P6 U21.P4
ZED_DIR2: R91.P6 U32.P4
ZED_EXTINT: R9.P7 U1.5
ZED_EXTINT1: R52.P7 U17.5
ZED_EXTINT2: R83.P7 U28.5
ZED_FENCE_STAT: J1.1 R25.P3
ZED_FENCE_STAT1: J36.1 R59.P3
ZED_FENCE_STAT2: J55.1 R90.P3
ZED_PPS_STAT: J6.5 R9.P8 U1.14
ZED_PPS_STAT1: J33.5 R52.P8 U17.14
ZED_PPS_STAT2: J52.5 R83.P8 U28.14
ZED_RTK_STAT: J1.2 R25.P4
ZED_RTK_STAT1: J36.2 R59.P4
ZED_RTK_STAT2: J55.2 R90.P4
ZED_WT: R4.P5 U8.P4
ZED_WT1: R60.P5 U20.P4
ZED_WT2: R91.P5 U31.P4

## Tracks (layer width: path | path; a pad name or v marks a point on that pad's centre or on a via)
3.3V  (via drill 0.3)
  Top 0.178: U9.P6 59.65,43.49 | C27.1 59.17,43.01 59.65,43.49 | 59.65,43.49 59.69,43.45 v60.04,43.45 | C29.1 57.98,35.97 v57.96,35.96 | U8.P6 58.87,38.47 v58.47,38.87 | 30.01,68.97 | R6.2 64.87,43.52 v64.92,43.47 64.87,43.42 R8.2 | U13.10 27.27,67.75 27.36,67.84 27.74,67.84 | 27.74,67.84 28.37,67.84 28.87,68.34 C28.1 | U13.9 27.77,67.8 27.74,67.84 | U13.3 28.27,64.51 28.16,64.41 27.74,64.41 | 27.74,64.41 27.61,64.41 27.17,63.97 C19.1 27.17,61.46 v27.23,61.4 | U13.2 27.77,64.44 27.74,64.41
  Top 0.305: v36.52,74.12 36.57,74.07 U1.16 34.07,69.77 C3.1 30.87,69.82 30.01,68.97 | 30.01,68.97 C28.1
  Top 0.559: C16.1 59.9,29.97 J12.4 v60.07,24.4 60.07,21.38 62,19.45 J2.1 62,15.82 v61.97,15.79 | J17.2 11.52,59.93 J13.2 11.52,50.24 13.23,48.53 24.53,48.53 v27.72,51.72 30.12,54.12 C5.2 C4.1 38.12,54.02 U2.5 40.27,54.02 v41.02,53.27 v41.01,53.27 41.01,50.18 41.07,50.12 | U11.P33 42.71,48.15 | 42.71,48.15 42.71,49.44 C2.1 41.07,50.12 | U11.P34 41.61,48.05 41.71,48.15 42.71,48.15 | U11.P38 37.21,49.31 C7.2 R15.2 41.07,50.12
  Route2 0.559: v25.78,89.34 25.91,89.22 58.8,89.22 v59.05,89.47 | v60.09,51.71 42.57,51.71 v41.01,53.27
  Bottom 0.178: v58.47,38.87 60.06,38.87 60.07,38.88 | v57.96,35.96 60.07,35.96 | R34.2 59.01,92.98 | v64.92,43.47 60.06,43.47 v60.04,43.45 | v27.23,61.4 27.23,55.33 27.12,55.22 27.12,52.32 v27.72,51.72
  Bottom 0.305: C13.1 C14.1 24.17,105.47 24.12,105.42 | U6.16 24.12,105.42 | 24.12,105.42 24.88,105.42 25.78,104.51 25.78,103.06 | J16.4 61.67,24.81 61.26,24.4 v60.07,24.4
  Bottom 0.559: 25.78,101.61 v25.78,89.34 25.78,75.76 27.42,74.12 v36.52,74.12 39.1,74.12 41.01,72.22 v41.01,53.27 | 25.78,103.06 25.78,101.61 | U6.4 25.78,101.61 | v59.05,89.47 59.01,89.51 59.01,92.98 59.01,104.28 | 59.01,104.28 59.01,111.84 58.03,112.82 C10.1 C11.1 51.08,112.82 50.77,113.13 U5.2 | 59.01,104.28 53.87,104.28 | R13.2 53.87,104.28 | 53.87,104.28 52.41,104.28 52.02,104.67 R20.2 | J12.4 60.07,35.96 60.07,38.88 60.07,40.02 60.04,40.05 v60.04,43.45 v60.04,49.17 60.04,51.66 v60.09,51.71 | v61.97,15.79 61.2,15.02 55.26,15.02 54.67,14.44 49.92,14.44 48.54,15.82 41.88,15.82 41.52,16.18 J4.2
3.3V1  (via drill 0.3)
  Top 0.178: U21.P6 128.36,43.49 | C51.1 127.88,43.01 128.36,43.49 | 128.36,43.49 128.4,43.45 v128.75,43.45 | C52.1 126.68,35.97 v126.67,35.96 | U20.P6 127.58,38.47 v127.18,38.87 | 98.72,68.97 | R61.2 133.58,43.52 v133.63,43.47 133.58,43.42 R62.2 | U18.10 95.98,67.75 96.06,67.84 96.44,67.84 | 96.44,67.84 97.08,67.84 97.58,68.34 C48.1 | U18.9 96.48,67.8 96.44,67.84 | U18.3 96.98,64.51 96.87,64.41 96.44,64.41 | 96.44,64.41 96.32,64.41 95.88,63.97 C49.1 95.88,61.46 v95.94,61.4 | U18.2 96.48,64.44 96.44,64.41
  Top 0.305: v105.23,74.12 105.28,74.07 U17.16 102.78,69.77 C44.1 99.57,69.82 98.72,68.97 | 98.72,68.97 C48.1
  Top 0.559: C40.1 128.61,29.97 J28.4 v128.78,24.4 128.78,21.38 130.71,19.45 J26.1 130.71,15.82 v130.68,15.79 | J31.2 80.23,59.93 J32.2 80.23,50.24 81.93,48.53 93.24,48.53 v96.43,51.72 98.83,54.12 C25.2 C24.1 106.83,54.02 U3.5 108.98,54.02 v109.73,53.27 v109.72,53.27 109.72,50.18 109.78,50.12 | U22.P33 111.42,48.15 | 111.42,48.15 111.42,49.44 C31.1 109.78,50.12 | U22.P34 110.31,48.05 110.41,48.15 111.42,48.15 | U22.P38 105.92,49.31 C32.2 R21.2 109.78,50.12
  Route2 0.559: v94.49,89.34 94.61,89.22 127.51,89.22 v127.76,89.47 | v128.8,51.71 111.28,51.71 v109.72,53.27
  Bottom 0.178: v127.18,38.87 128.76,38.87 128.78,38.88 | v126.67,35.96 128.78,35.96 | R58.2 127.72,92.98 | v133.63,43.47 128.77,43.47 v128.75,43.45 | v95.94,61.4 95.94,55.33 95.83,55.22 95.83,52.32 v96.43,51.72
  Bottom 0.305: C38.1 C39.1 92.88,105.47 92.83,105.42 | U12.16 92.83,105.42 | 92.83,105.42 93.58,105.42 94.49,104.51 94.49,103.06 | J37.4 130.38,24.81 129.97,24.4 v128.78,24.4